# Altium PCB Main.PcbDoc (part 1 of 4)
Units mil, origin at the board's own origin, x right, y up, seen from the top; angles counter-clockwise.
Board outline 4000 x 4000 mil, 4 copper layers (L1-Top, L2-Ground, L3-Power, L4-Bottom), stack 63.556 mil thick; 424 components, 250 nets, 1628 pads, 3310 vias.
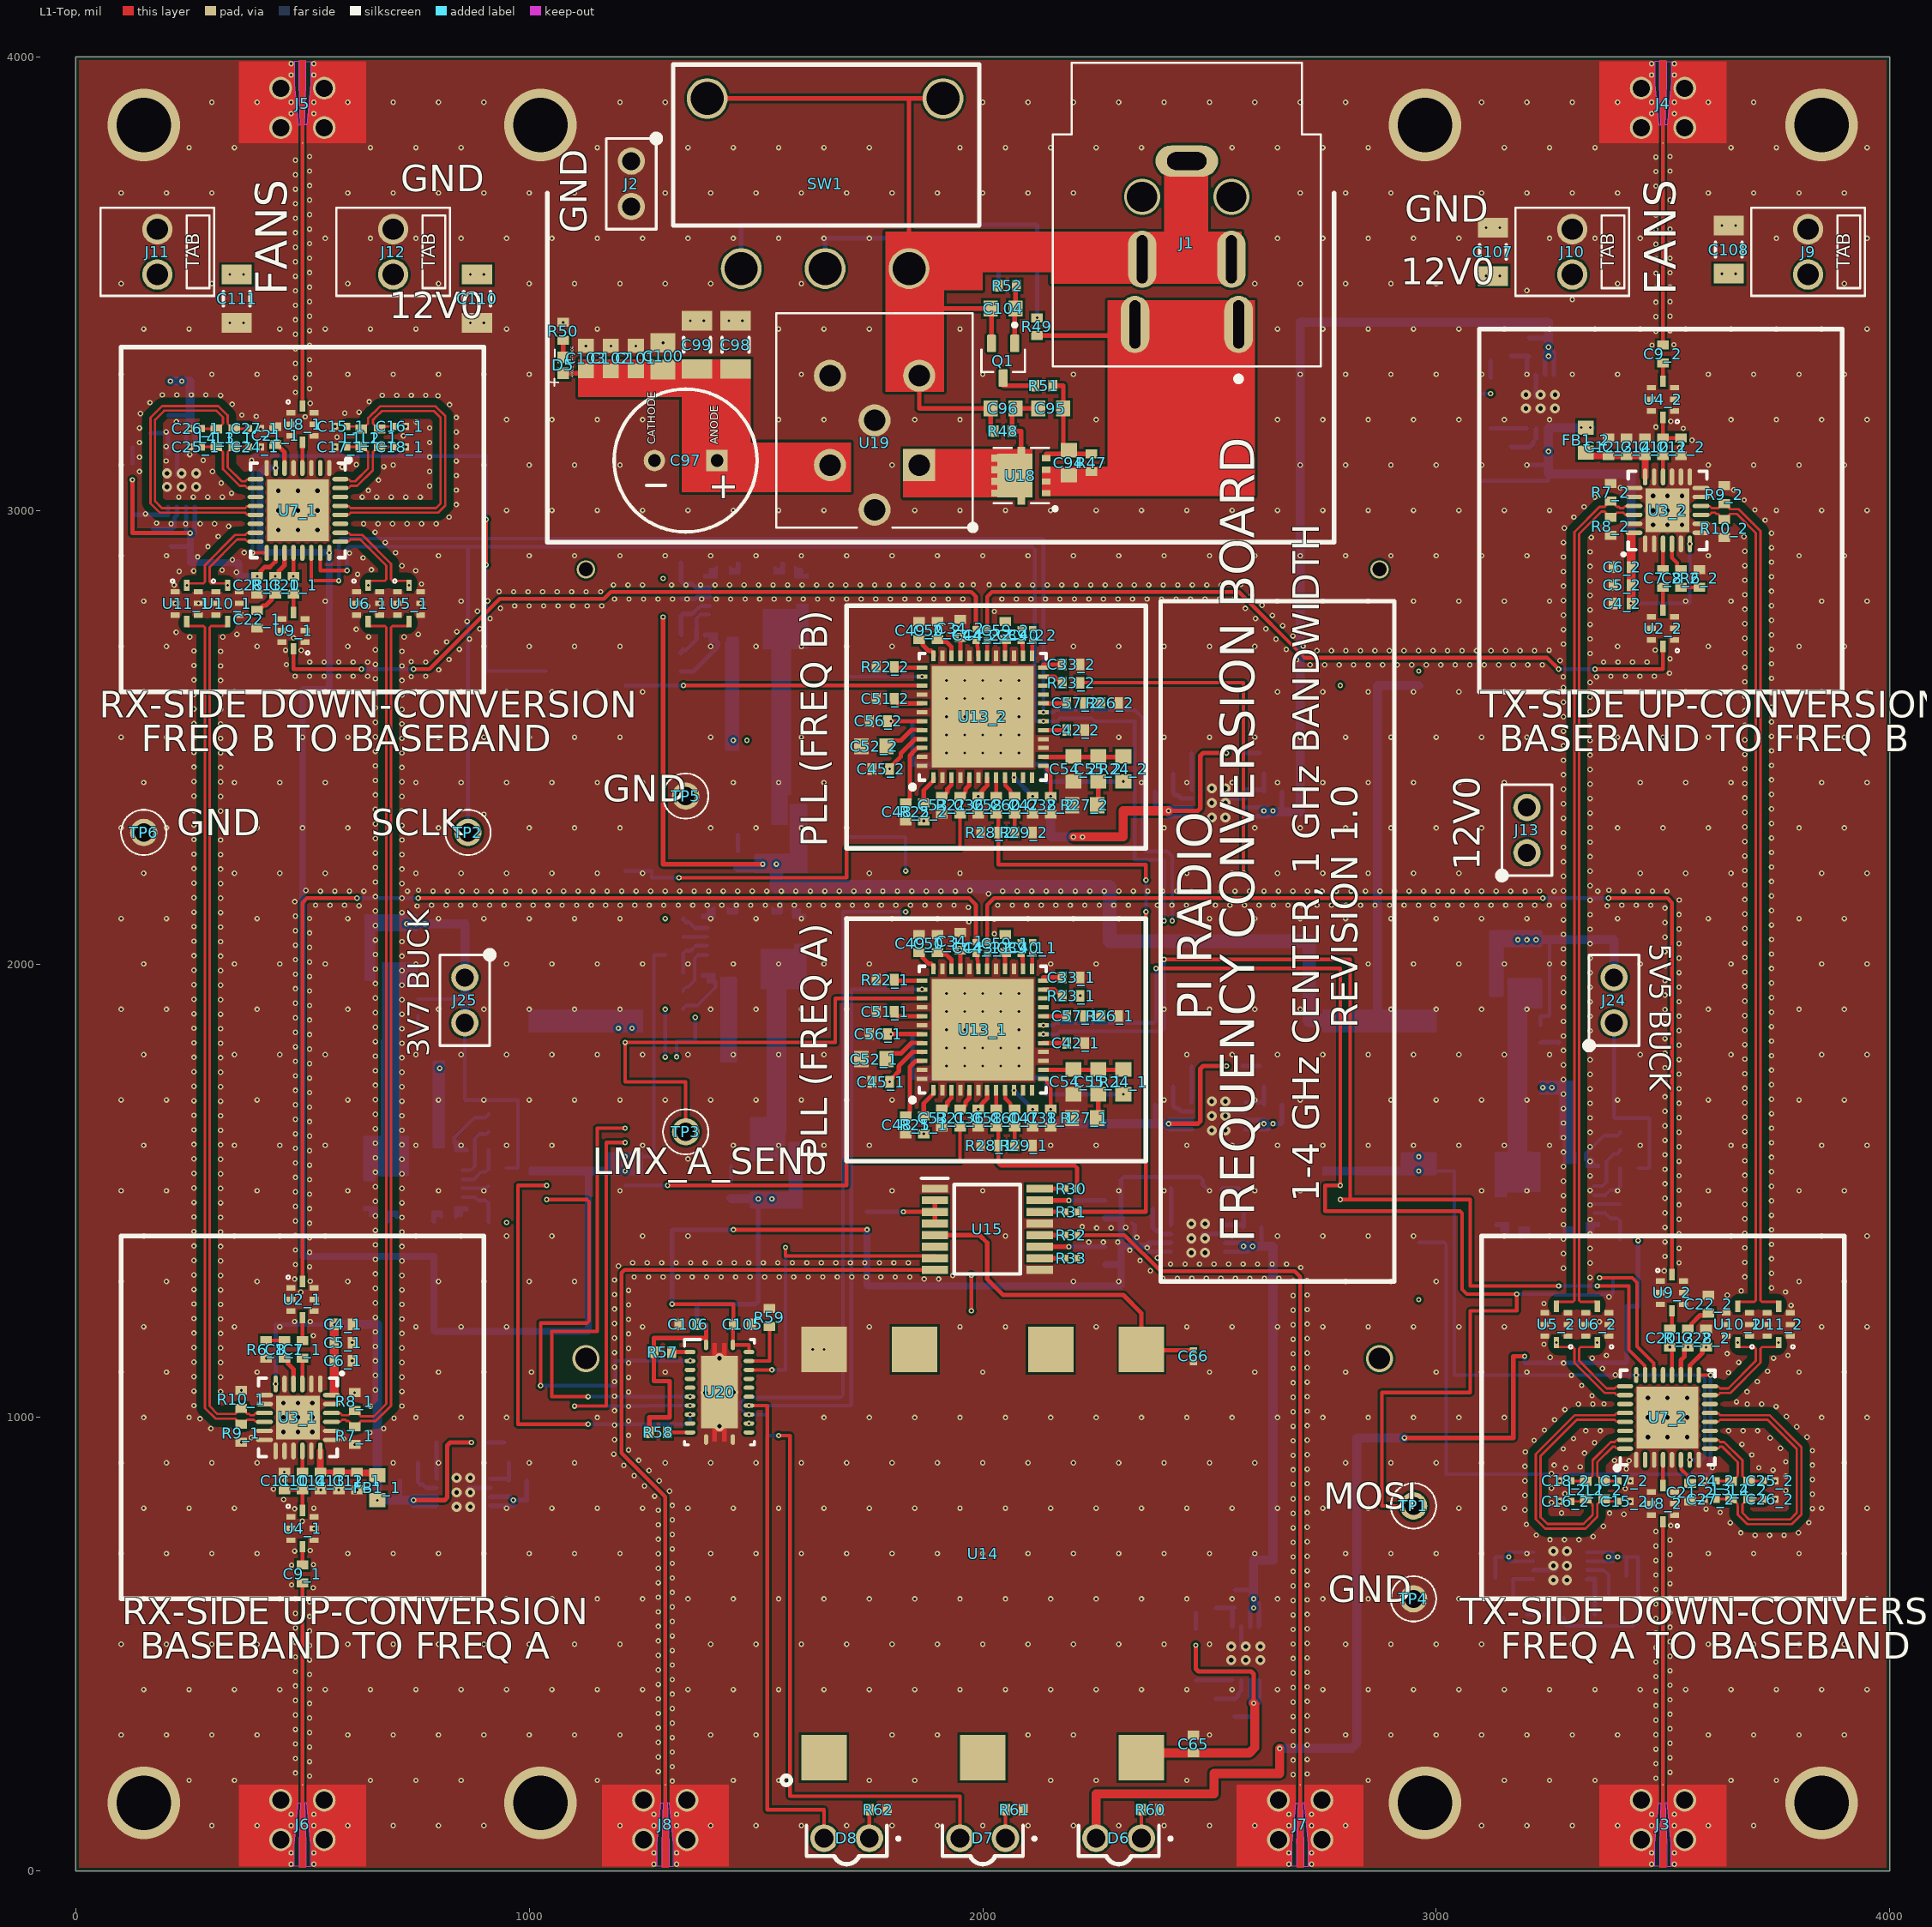
[diagram p0: L1-Top view]
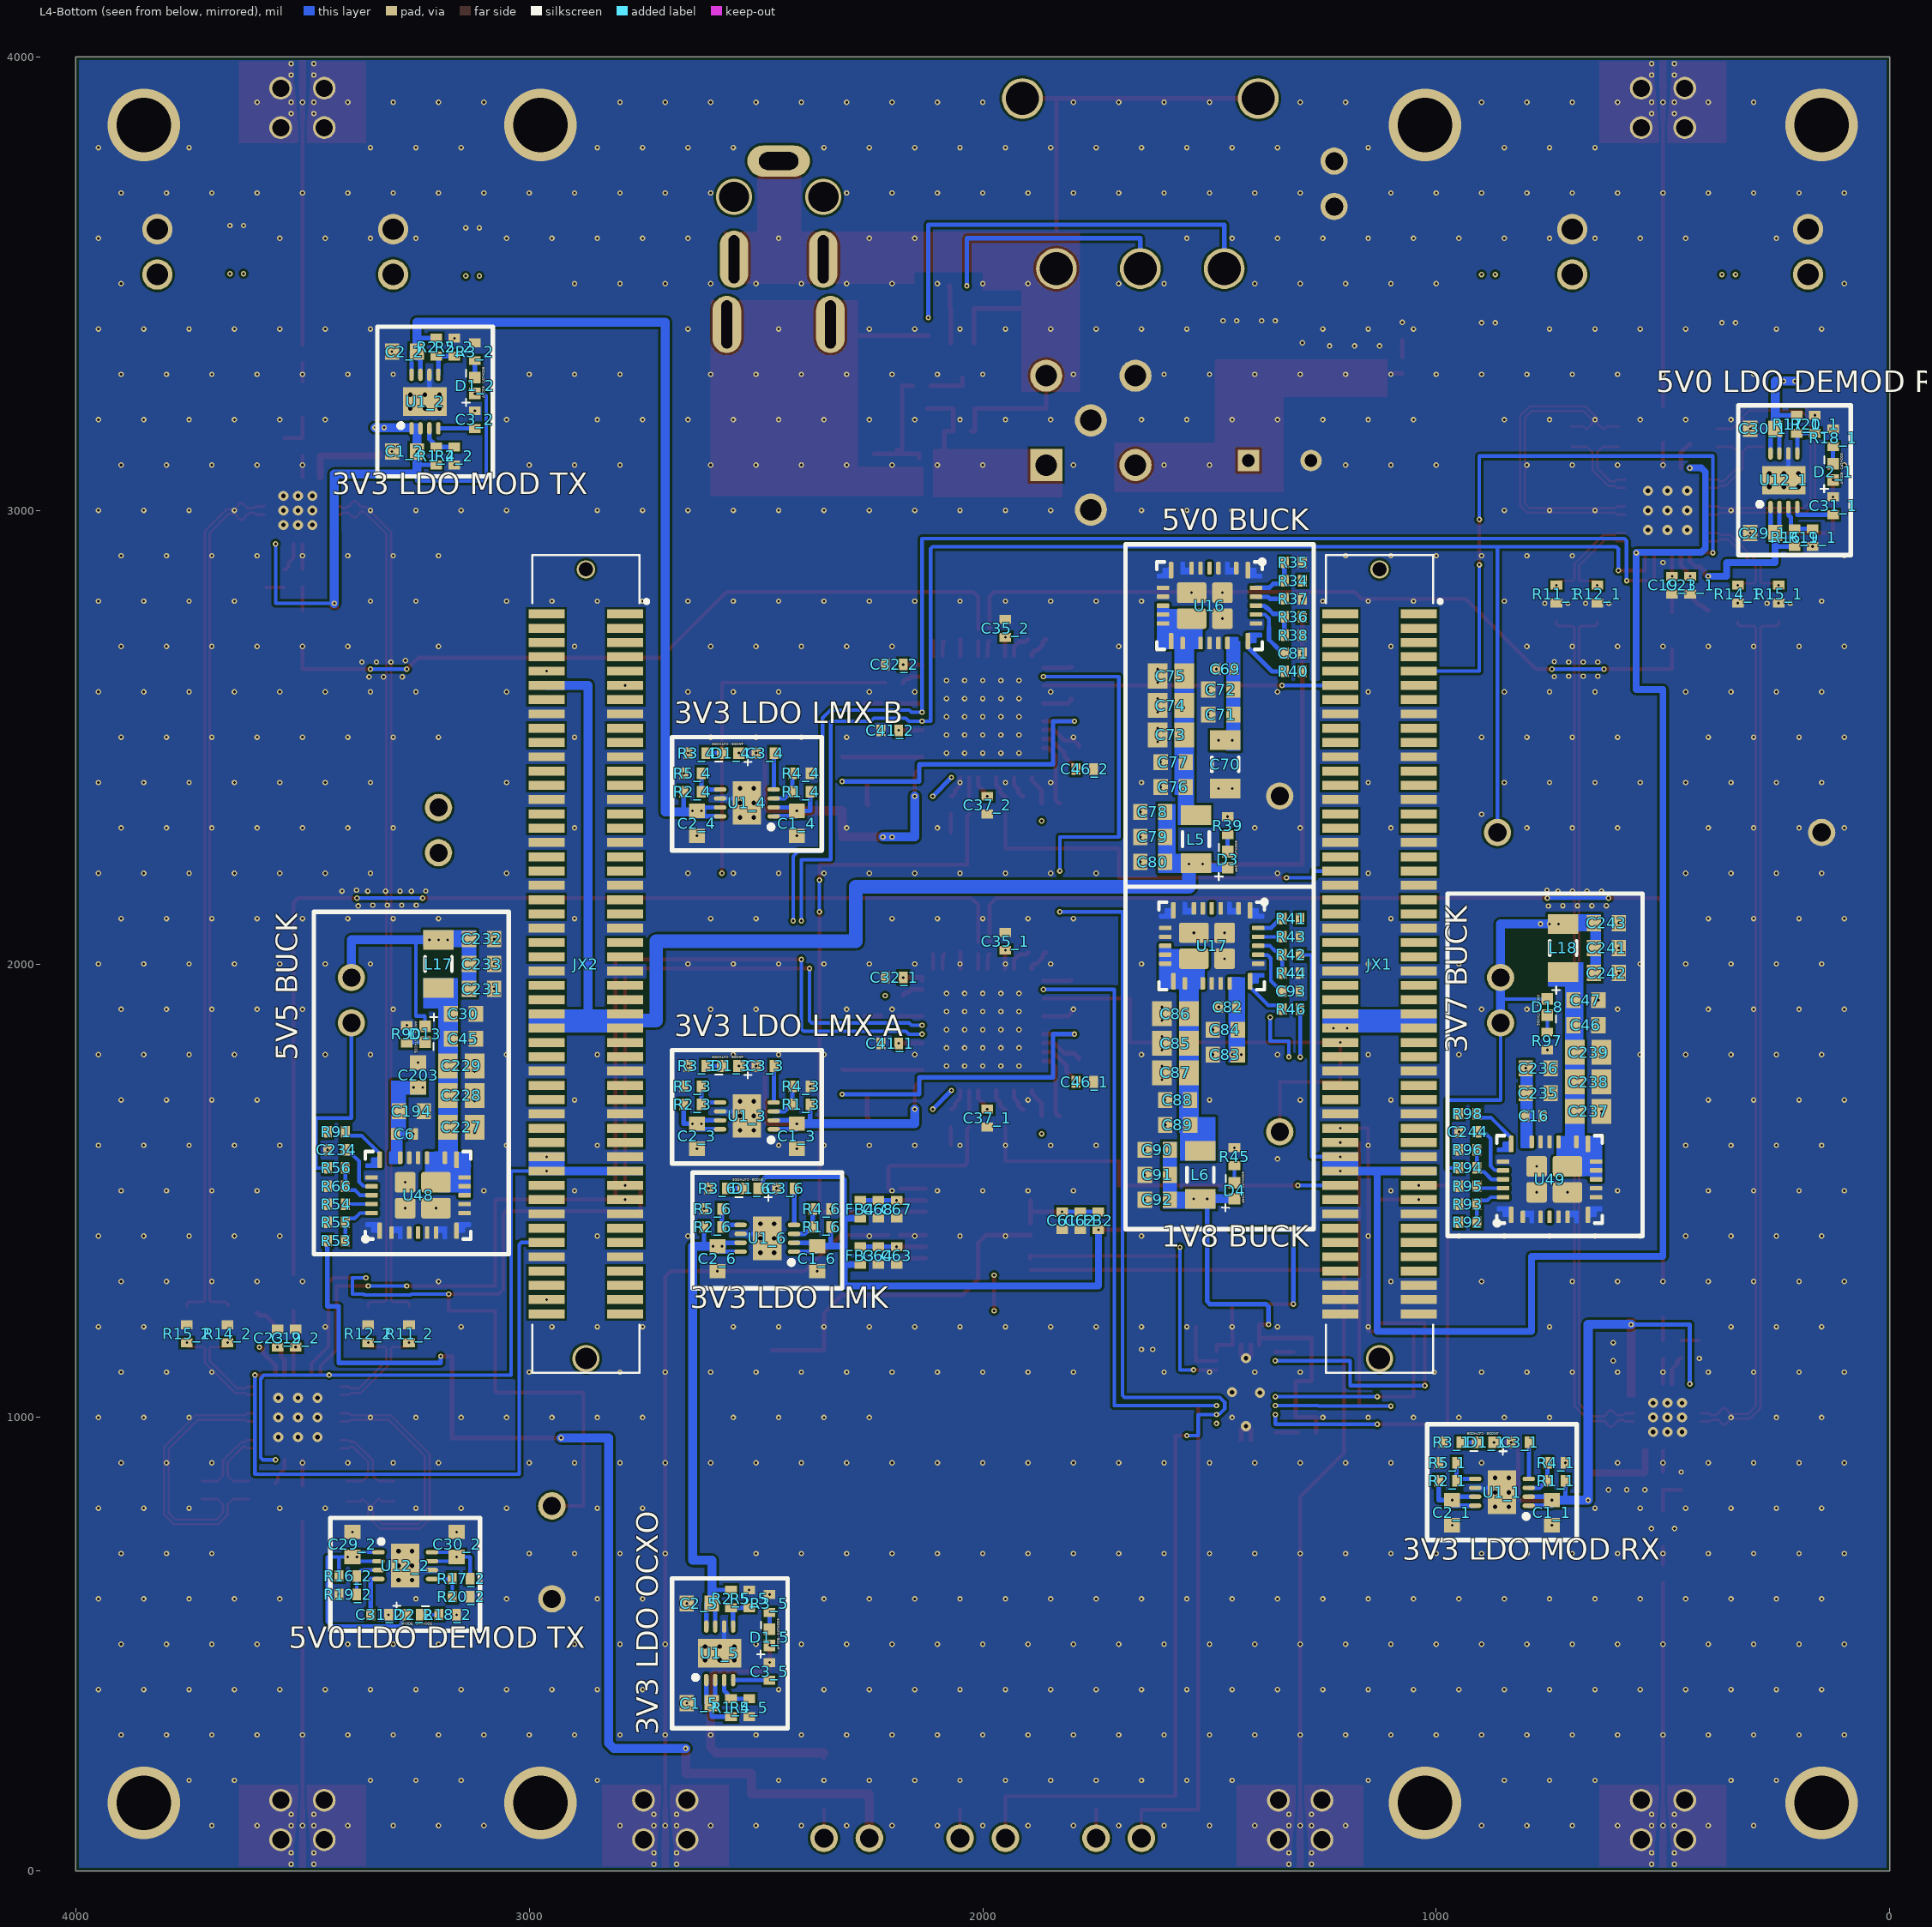
[diagram p1: L4-Bottom view, seen from below]
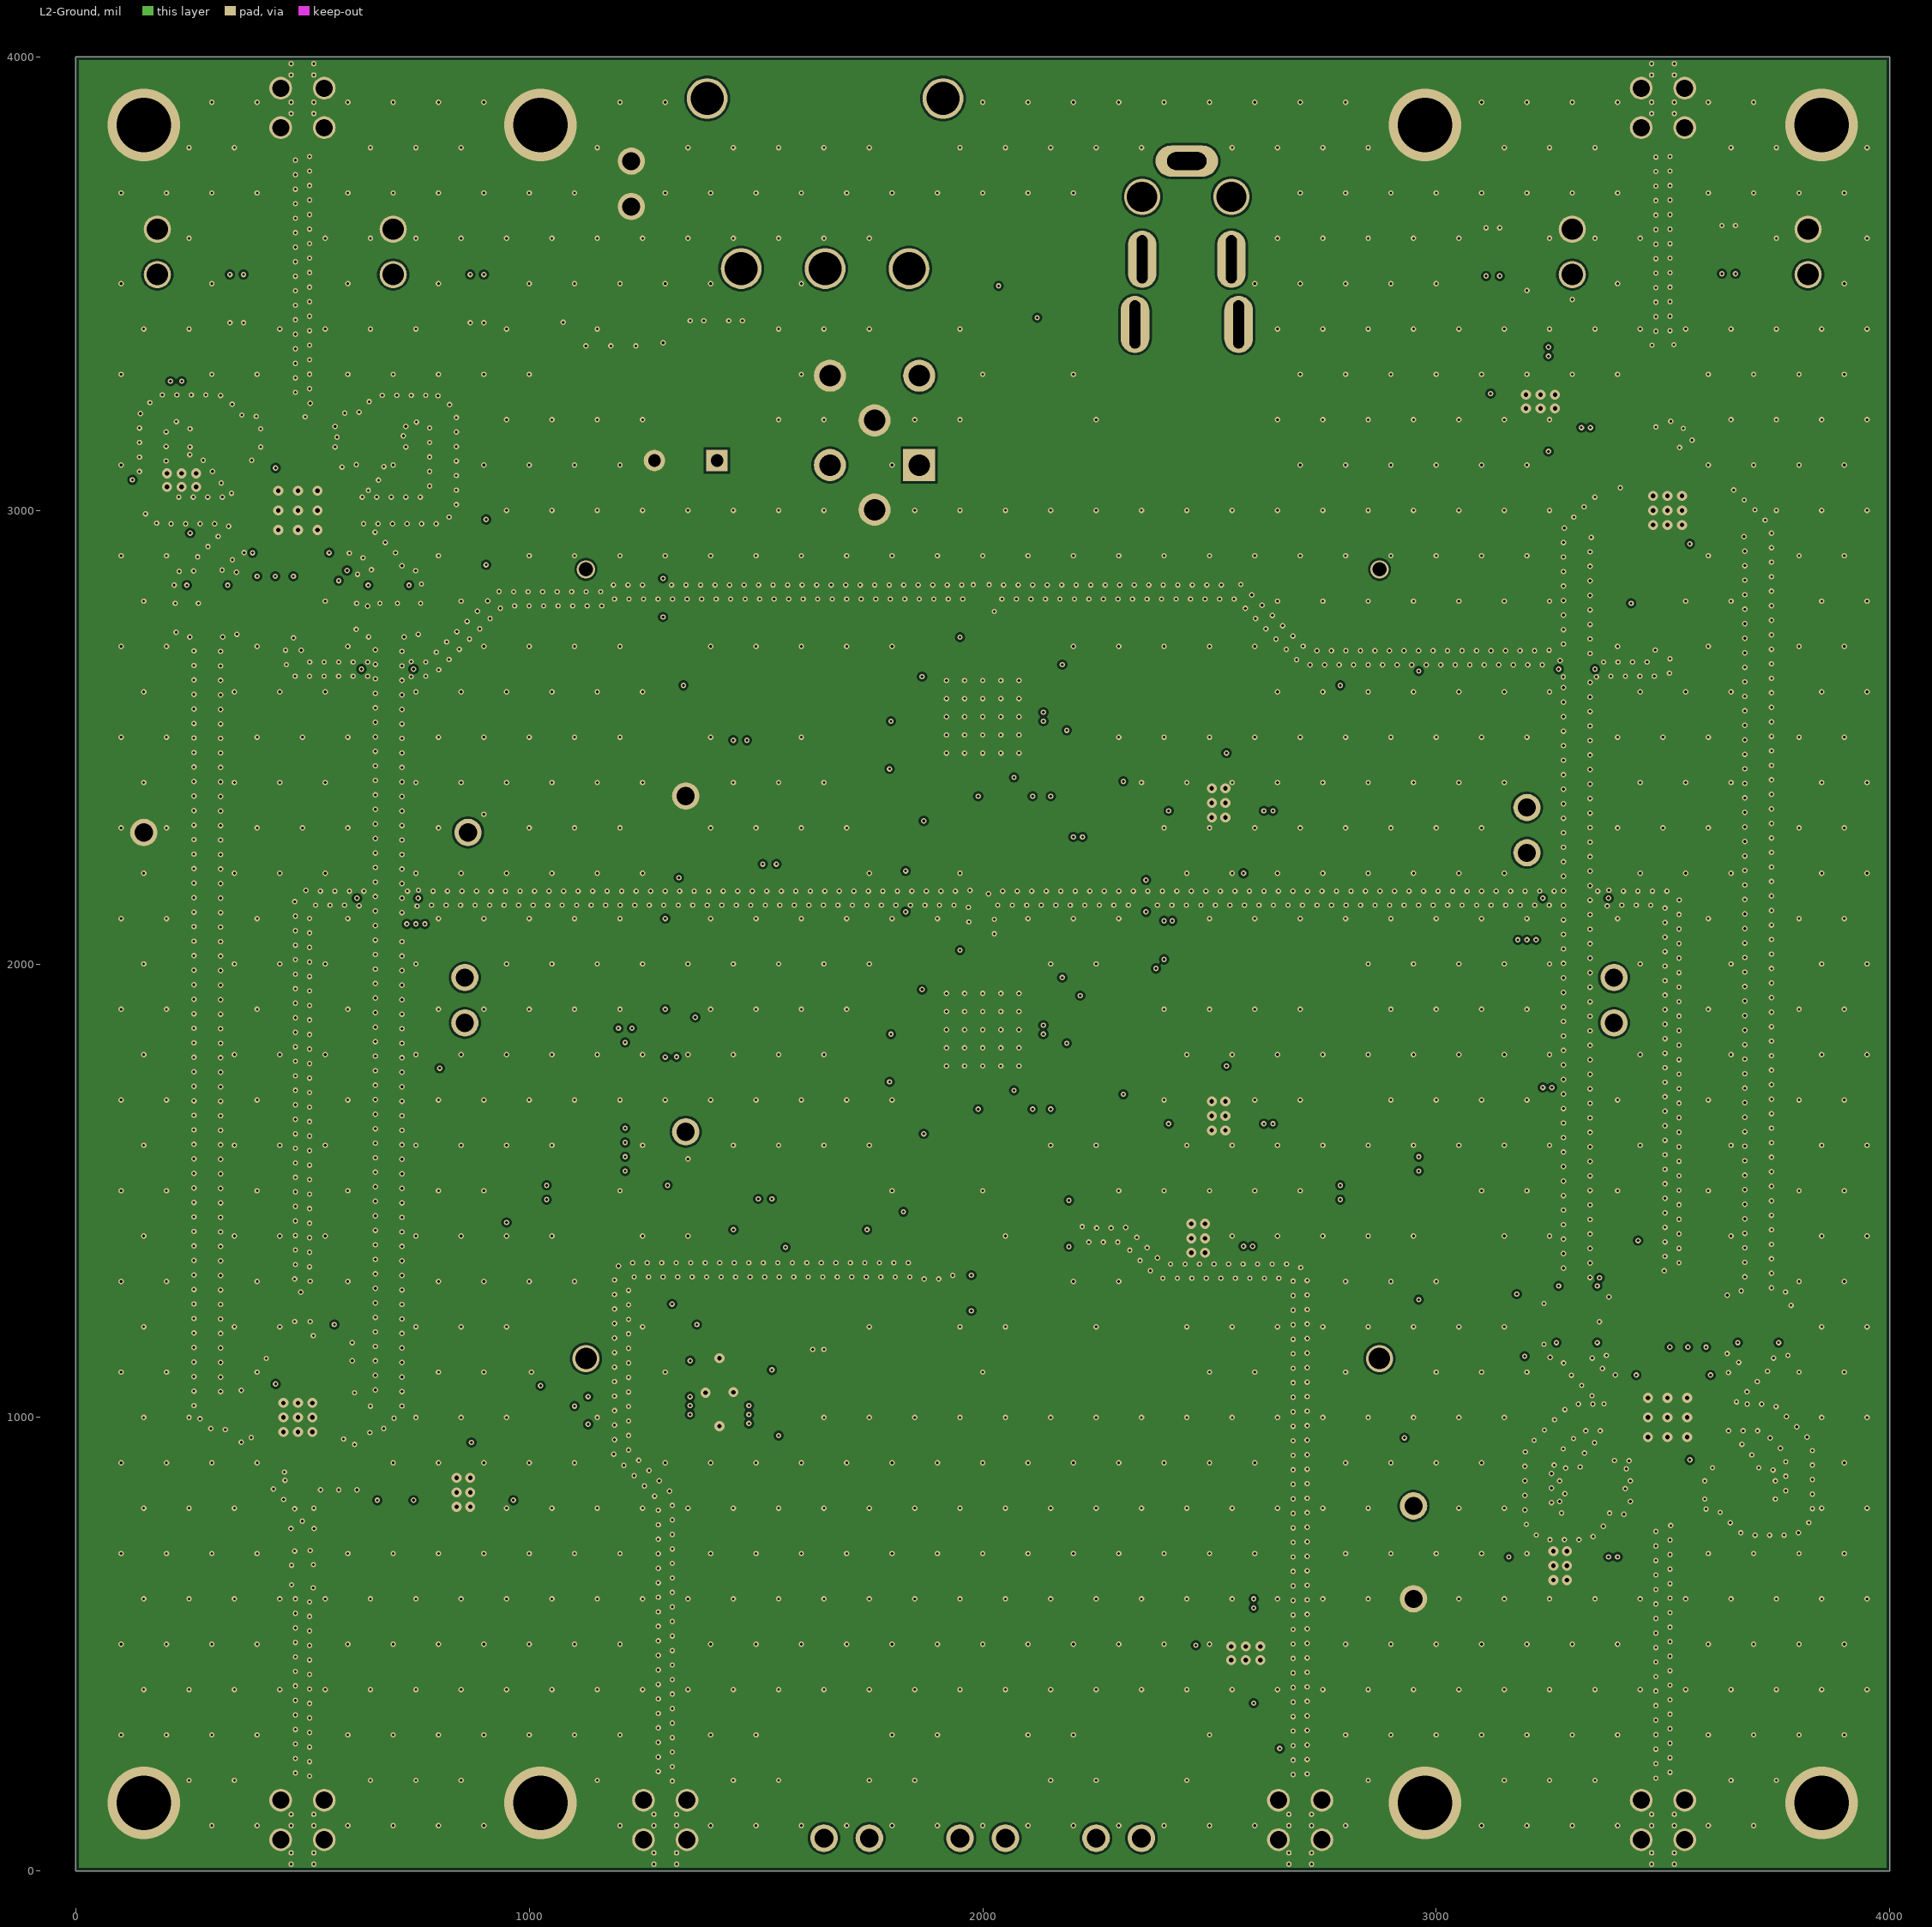
[diagram p2: L2-Ground]
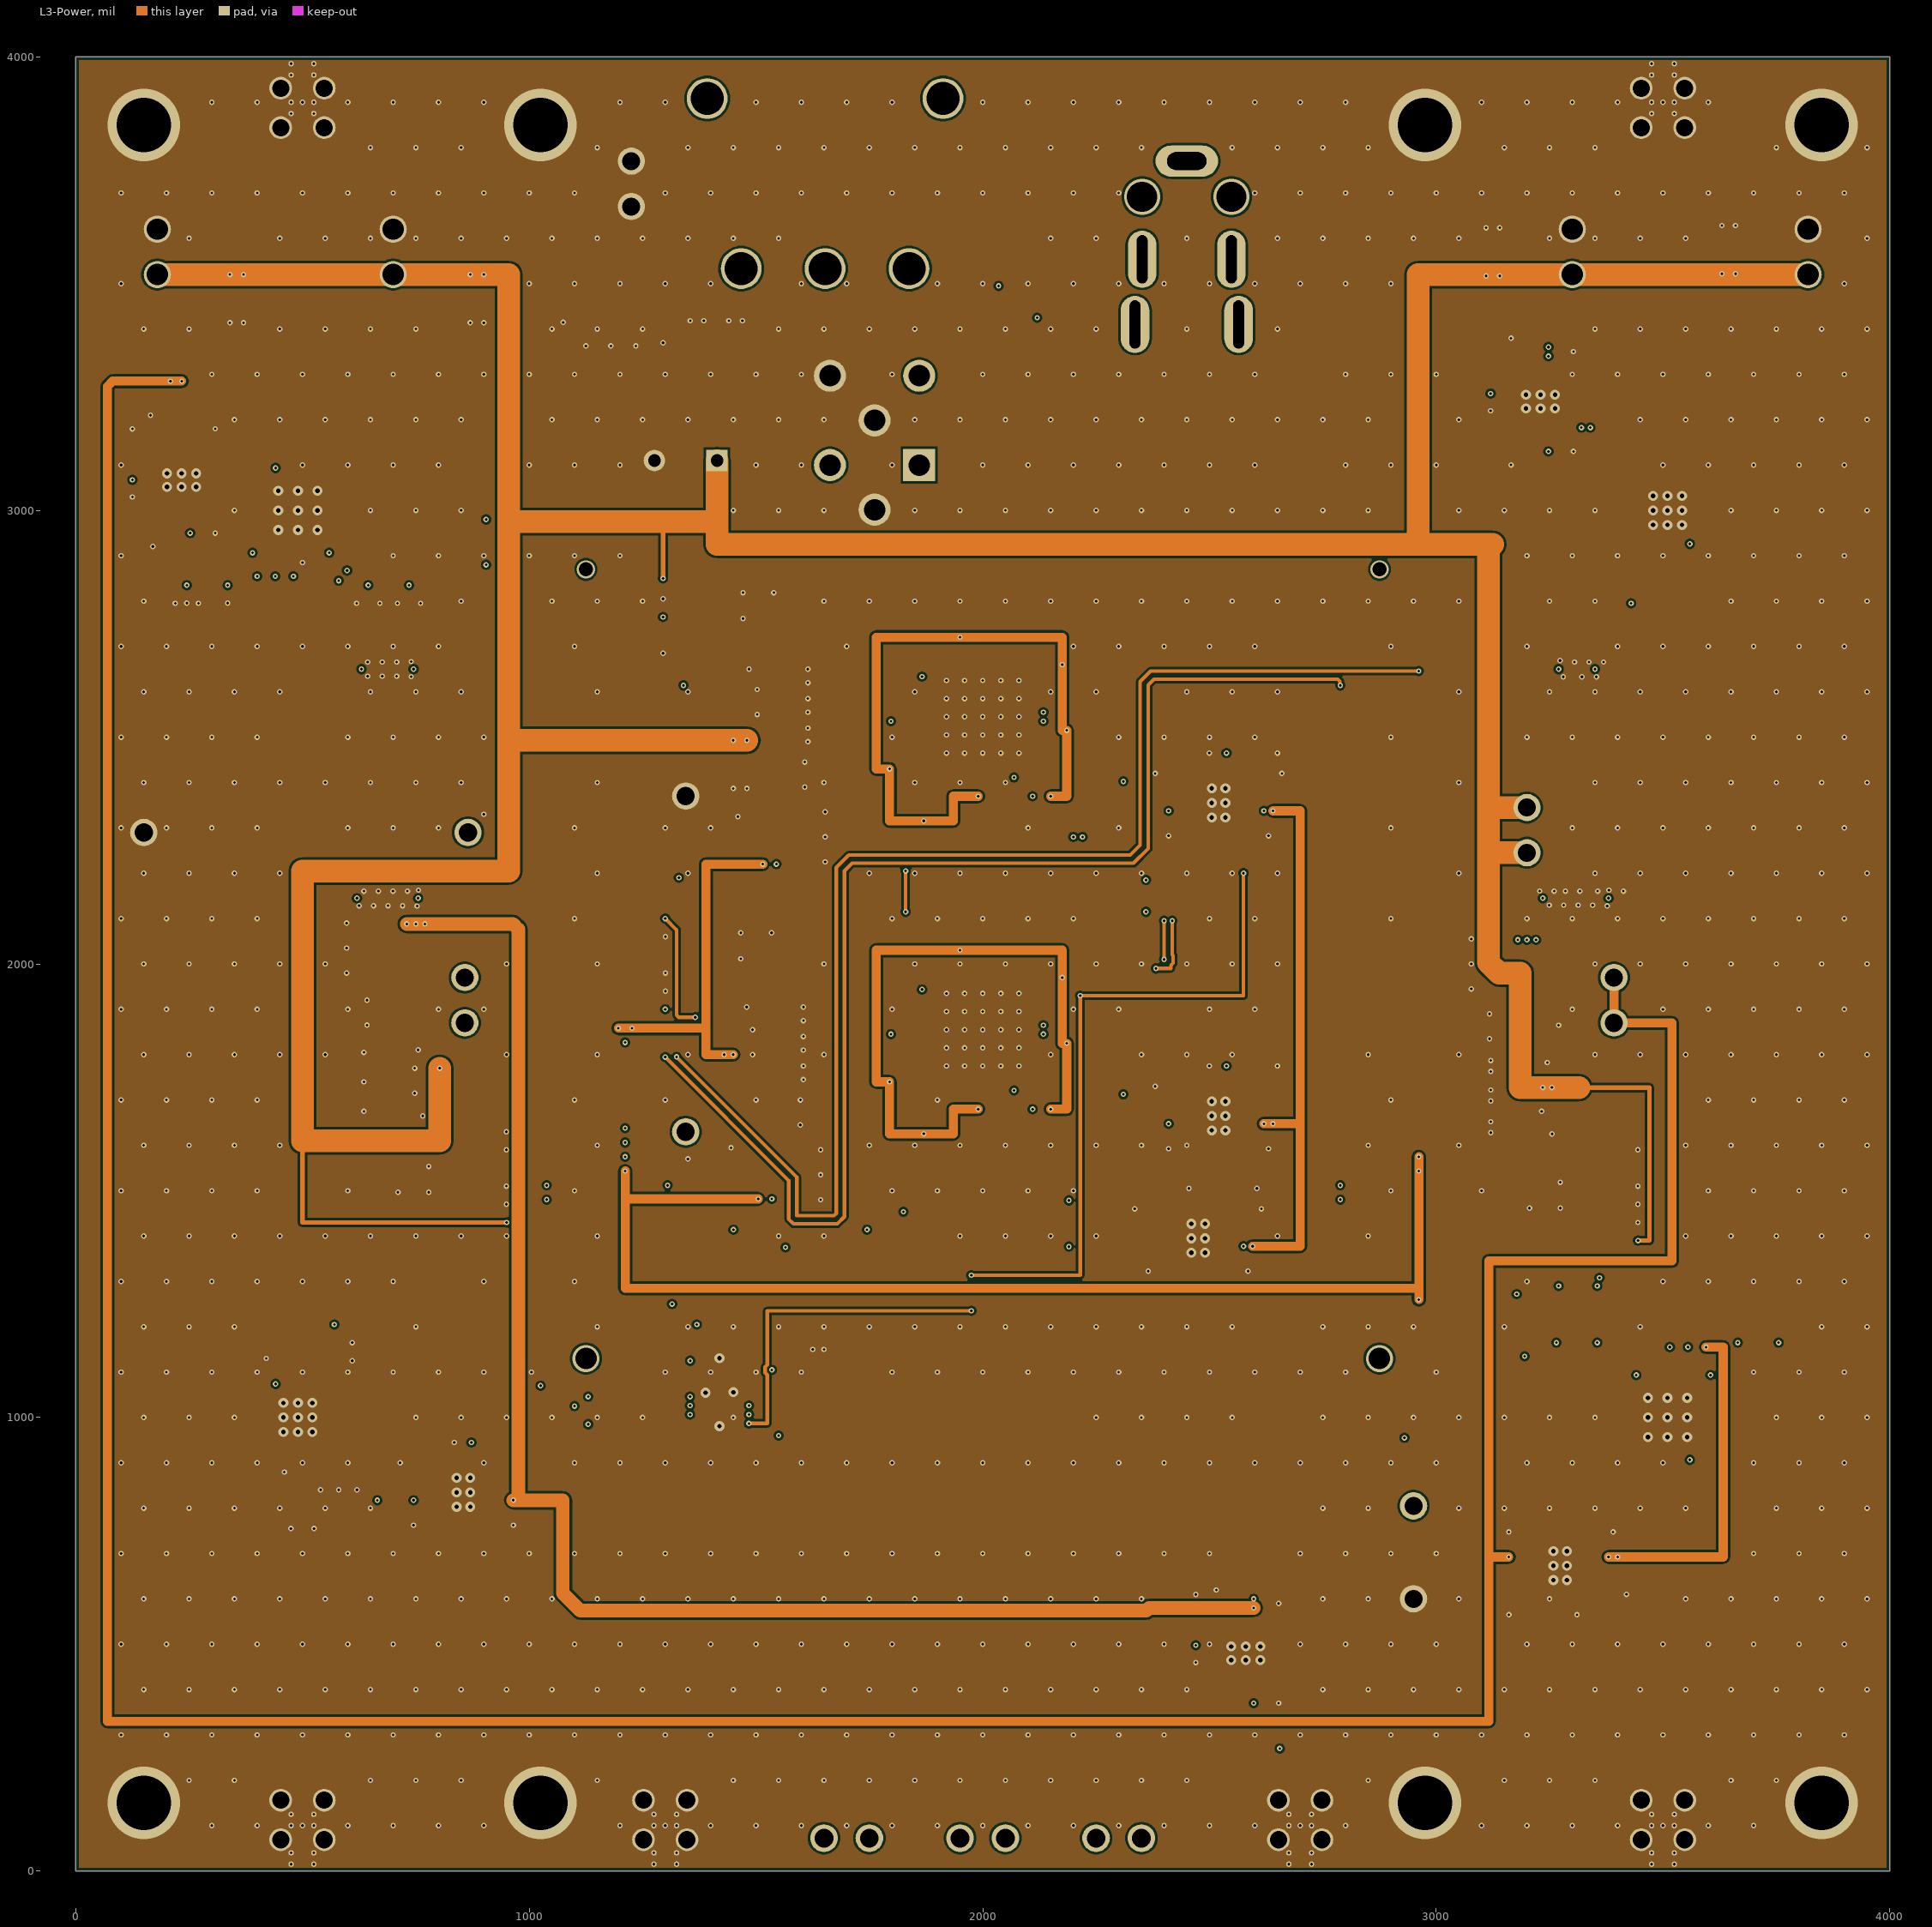
[diagram p3: L3-Power]
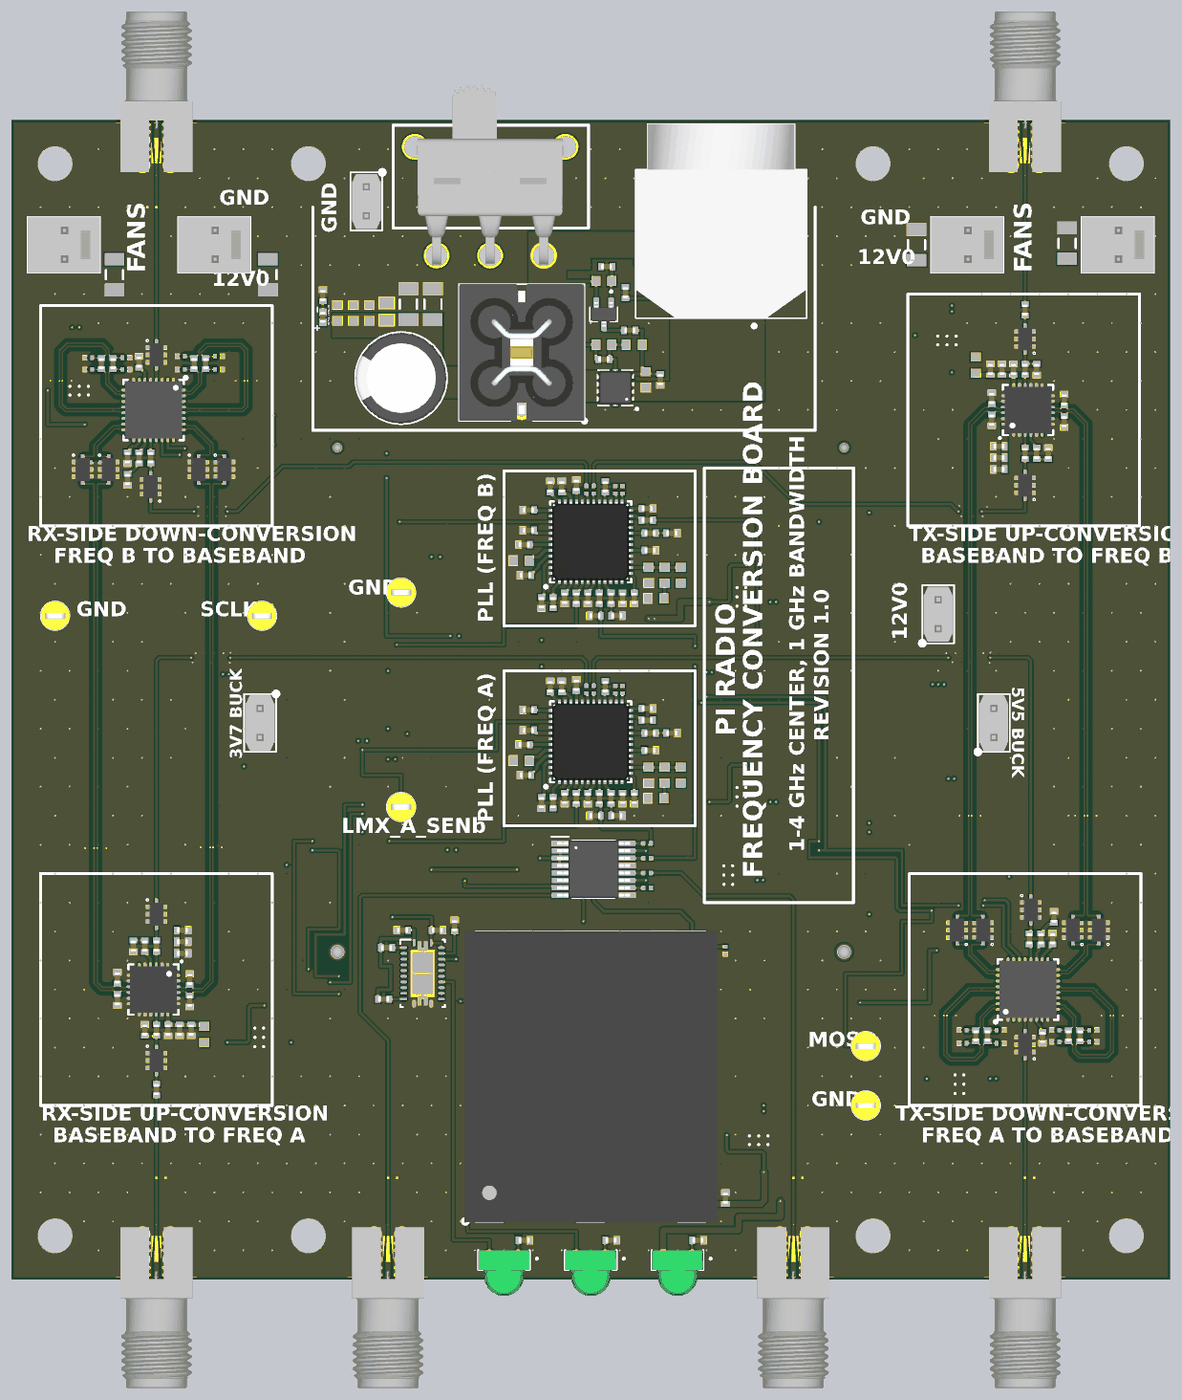
[diagram p7: 3D render of the assembled board from above, using the file's embedded part models]
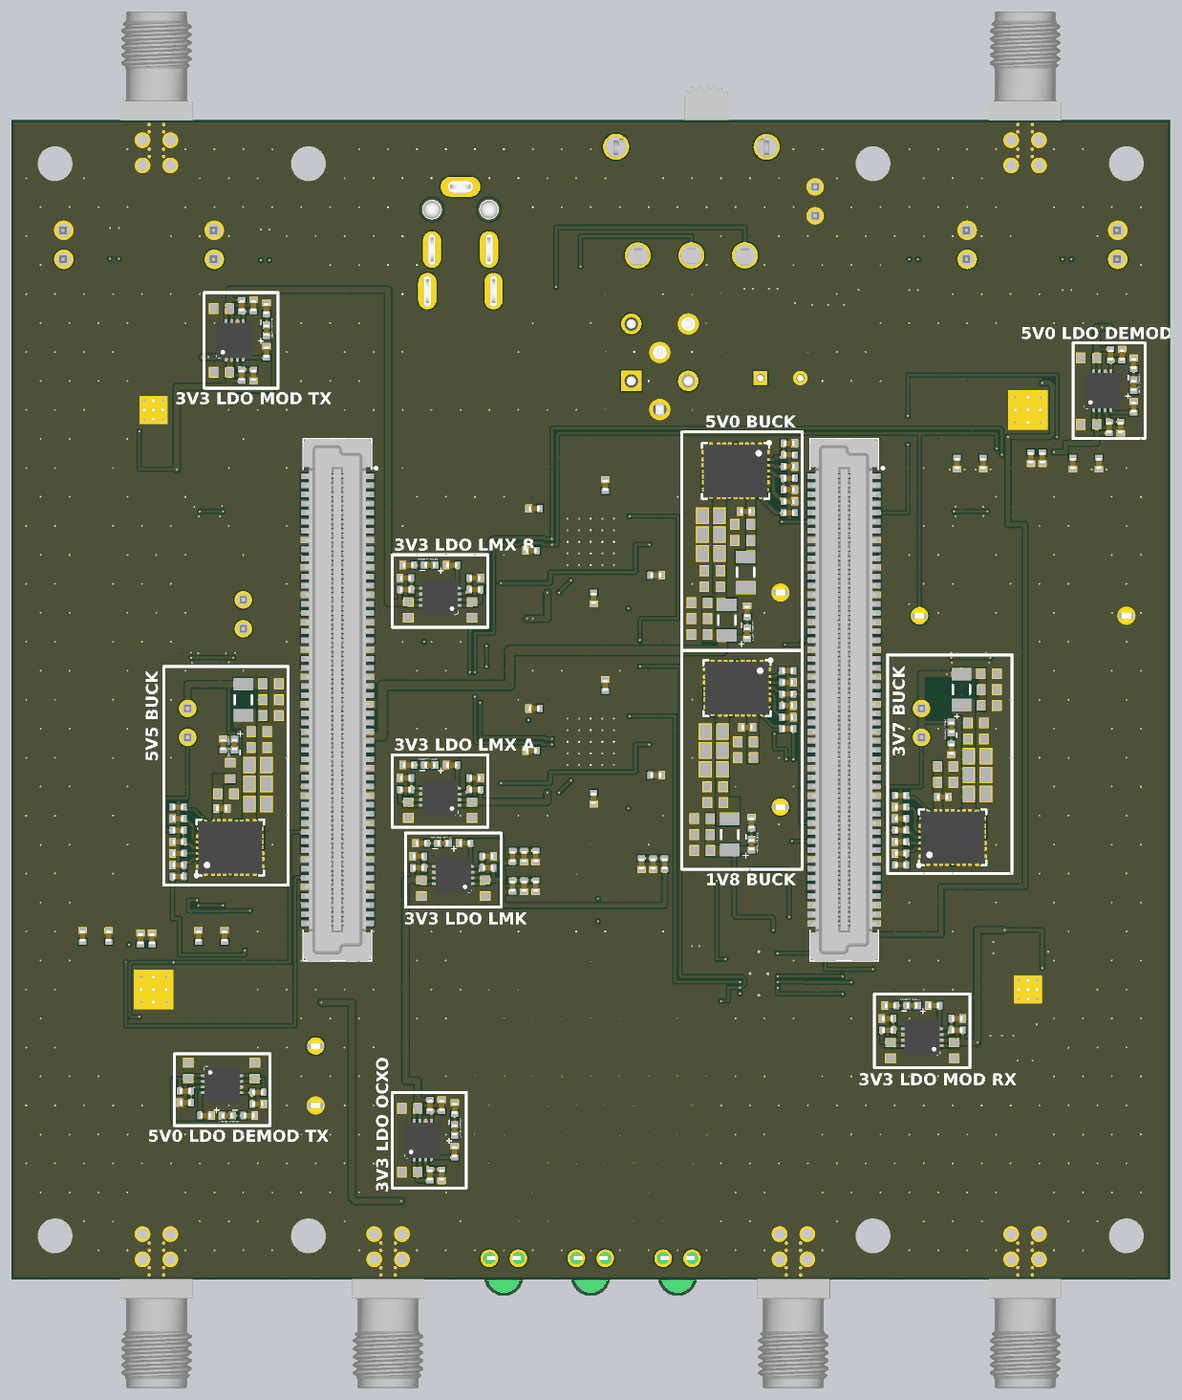
[diagram p8: 3D render of the assembled board from below, using the file's embedded part models]

## Layer stack, top to bottom
Top Solder: solder mask 0.4, Solder Resist, Dk 3.5
L1-Top: signal copper 1.378
Dielectric L1L2: core 4, FR408HR, Dk 3.55
L2-Ground: signal copper 1.4
Dielectric L4L5: prepreg 50, FR408HR, Dk 3.55
L3-Power: signal copper 1.4
Dielectric L5L6: core 4, FR408HR, Dk 3.55
L4-Bottom: signal copper 1.378
Bottom Solder: solder mask 0.4, Solder Resist, Dk 3.5

## Board outline
0,0 4000,0 4000,4000 0,4000

## Design rules (kind name [scope] priority, off if disabled: settings)
BoardOutlineClearance [All] p1: gap=7 ignorepadtopadclearanceinfootprint=FALSE
Clearance Clearance_Diff_Clearance [InNetClass('DIFF_100') vs InNet('GND')] p1: gap=5 ignorepadtopadclearanceinfootprint=FALSE except(15: Arc-Poly Track-Poly)
Clearance "Stitching GND" [IsStitchingVia and InNet('GND') vs IsStitchingVia and InNet('GND')] p2: gap=15 ignorepadtopadclearanceinfootprint=FALSE
Clearance Clearance_SMA [HasFootprint('Amphenol RF 901-10510-1 - 8.8mil GCPW') vs HasFootprint('Amphenol RF 901-10510-1 - 8.8mil GCPW')] p3: gap=0 ignorepadtopadclearanceinfootprint=FALSE
Clearance [All] p4: gap=5 ignorepadtopadclearanceinfootprint=FALSE
DiffPairsRouting [All] p1: maxlimit=10 minlimit=5 mostfreqgap=10 toplayer_maxgap=5 toplayer_prefgap=5 toplayer_minwidth=5.24 toplayer_maxwidth=5.24 toplayer_prefwidth=5.24 bottomlayer_maxgap=5 bottomlayer_prefgap=5 bottomlayer_minwidth=5.24 bottomlayer_maxwidth=5.24 bottomlayer_prefwidth=5.24 impedanceprofiledriven=TRUE impedanceprofileid={0648F5B5-C36B-4D30-86E2-53ED48371582} impedanceprofilevalue=100.000000 maxuncoupledlength=500
HoleSize [All] p1: absolutevalues=TRUE maxlimit=120 minlimit=1 maxpercent=80.000 minpercent=20.000
MinimumSolderMaskSliver [All] p1: minsoldermaskwidth=4
PolygonConnect [All] p1: connectstyle=Direct reliefconductorwidth=10 reliefentries=4 polygonreliefangle="90 Angle" airgapwidth=10
RoomDefinition U_Buck_TPSM82913_3V7 [InComponentClass('U_Buck_TPSM82913_3V7')] p1: confinementstyle=ConfineIn formatcopy=TRUE lockcomponents=FALSE outline 975,2125 975,1400 565,1400 565,2125
RoomDefinition U_Buck_TPSM82913_5V5 [InComponentClass('U_Buck_TPSM82913_5V5')] p2: confinementstyle=ConfineIn formatcopy=TRUE lockcomponents=FALSE outline 3475,2090 3475,1360 3040,1360 3040,2090
RoomDefinition IQ_Demod_RX [InComponentClass('IQ_Demod_RX')] p3: confinementstyle=ConfineIn formatcopy=TRUE lockcomponents=FALSE outline 825,3275 150,3275 150,2650 825,2650
RoomDefinition U_5V5_to_5V0_LDO1 [InComponentClass('U_5V5_to_5V0_LDO1')] p4: confinementstyle=ConfineIn formatcopy=TRUE lockcomponents=FALSE outline 100,2900 100,3235 335,3235 335,2900
RoomDefinition U_Buck_TPSM82913_1V8 [InComponentClass('U_Buck_TPSM82913_1V8')] p5: confinementstyle=ConfineIn formatcopy=TRUE lockcomponents=FALSE outline 1275,1445 1275,2160 1675,2160 1675,1445
RoomDefinition IQ_Mod_TX [InComponentClass('IQ_Mod_TX')] p6: confinementstyle=ConfineIn formatcopy=TRUE lockcomponents=FALSE outline 3675,3400 3300,3400 3300,2650 3675,2650
RoomDefinition U_Buck_TPSM82913_5V0 [InComponentClass('U_Buck_TPSM82913_5V0')] p7: confinementstyle=ConfineIn formatcopy=TRUE lockcomponents=FALSE outline 1270,2177.74 1270,2910 1680,2910 1680,2177.74
RoomDefinition U_5V5_to_5V0_LDO2 [InComponentClass('U_5V5_to_5V0_LDO2')] p8: confinementstyle=ConfineIn formatcopy=TRUE lockcomponents=FALSE outline 3440,540 3105,540 3105,775 3440,775
RoomDefinition U_3V7_to_3V3_LDO1 [InComponentClass('U_3V7_to_3V3_LDO1')] p9: confinementstyle=ConfineIn formatcopy=TRUE lockcomponents=FALSE outline 695,965 1015,965 1015,735 695,735
RoomDefinition U_3V7_to_3V3_LDO2 [InComponentClass('U_3V7_to_3V3_LDO2')] p10: confinementstyle=ConfineIn formatcopy=TRUE lockcomponents=FALSE outline 3100,3080 3100,3400 3330,3400 3330,3080
RoomDefinition U_3V7_to_3V3_LDO3 [InComponentClass('U_3V7_to_3V3_LDO3')] p11: confinementstyle=ConfineIn formatcopy=TRUE lockcomponents=FALSE outline 2360,1795 2680,1795 2680,1565 2360,1565
RoomDefinition U_3V7_to_3V3_LDO4 [InComponentClass('U_3V7_to_3V3_LDO4')] p12: confinementstyle=ConfineIn formatcopy=TRUE lockcomponents=FALSE outline 2360,2485 2680,2485 2680,2255 2360,2255
RoomDefinition U_3V7_to_3V3_LDO_Crystal [InComponentClass('U_3V7_to_3V3_LDO_Crystal')] p13: confinementstyle=ConfineIn formatcopy=TRUE lockcomponents=FALSE outline 2450,320 2450,640 2680,640 2680,320
RoomDefinition U_3V7_to_3V3_LDO_LMK [InComponentClass('U_3V7_to_3V3_LDO_LMK')] p14: confinementstyle=ConfineIn formatcopy=TRUE lockcomponents=FALSE outline 2315,1525 2635,1525 2635,1295 2315,1295
RoomDefinition LMX2820_B [InComponentClass('LMX2820_B')] p15: confinementstyle=ConfineIn formatcopy=TRUE lockcomponents=FALSE outline 1700,2255 2360,2255 2360,2790 1700,2790
RoomDefinition LMX2820_A [InComponentClass('LMX2820_A')] p16: confinementstyle=ConfineIn formatcopy=TRUE lockcomponents=FALSE outline 1700,1565 2360,1565 2360,2100 1700,2100
RoomDefinition IQ_Mod_RX [InComponentClass('IQ_Mod_RX')] p17: confinementstyle=ConfineIn formatcopy=TRUE lockcomponents=FALSE outline 325,600 695,600 695,1350 325,1350
RoomDefinition IQ_Demod_TX [InComponentClass('IQ_Demod_TX')] p18: confinementstyle=ConfineIn formatcopy=TRUE lockcomponents=FALSE outline 3175,725 3850,725 3850,1350 3175,1350
RoutingVias [All] p1: holewidth=28 width=50 viastyle="Through Hole" minholewidth=28 minwidth=50 maxholewidth=28 maxwidth=50
SilkToSilkClearance [All] p1: silktosilkclearance=5
SilkToSolderMaskClearance [IsPad] p1: minsilkscreentomaskgap=2 clearancetoexposedcopper=TRUE
SolderMaskExpansion [All] p1: expansion=1 istentingtop=FALSE
SupplyNets "Schematic Supply Nets_6" [InNet('3V3')] p1: voltage=0.000
SupplyNets "Schematic Supply Nets_5" [InNet('5V5_Buck')] p2: voltage=0.000
SupplyNets "Schematic Supply Nets_7" [InNet('1V8')] p3: voltage=0.000
SupplyNets "Schematic Supply Nets_1" [InNet('12V0')] p4: voltage=0.000
SupplyNets "Schematic Supply Nets_17" [InNet('3V3_LDO_LMX_1')] p5: voltage=0.000
SupplyNets "Schematic Supply Nets_16" [InNet('VCCA_IQ_MOD_2')] p6: voltage=0.000
SupplyNets "Schematic Supply Nets_15" [InNet('VCCA_IQ_MOD_1')] p7: voltage=0.000
SupplyNets "Schematic Supply Nets_14" [InNet('VCCD_IQ_MOD_1')] p8: voltage=0.000
SupplyNets "Schematic Supply Nets_13" [InNet('3V3_LDO_LMX_2')] p9: voltage=0.000
SupplyNets "Schematic Supply Nets_12" [InNet('VCCD_IQ_MOD_2')] p10: voltage=0.000
SupplyNets "Schematic Supply Nets_11" [InNet('GND_IN')] p11: voltage=0.000
SupplyNets "Schematic Supply Nets_8" [InNet('5V0_Zynq')] p12: voltage=0.000
SupplyNets "Schematic Supply Nets_4" [InNet('3V7_Buck')] p13: voltage=0.000
SupplyNets "Schematic Supply Nets_3" [InNet('GND')] p14: voltage=0.000
SupplyNets "Schematic Supply Nets" [InNet('3V3_LDO_Crystal')] p15: voltage=0.000
Width Width_GCPW [InNetClass('RF50')] p1: maxlimit=8.8 minlimit=8 preferedwidth=8.8 toplayer_minwidth=8.8 midlayer2_minwidth=8.8 midlayer3_minwidth=8.8 minimp=50.000000 maximp=50.000000 favimp=50.000000
Width [All] p2: maxlimit=50 minlimit=8 preferedwidth=10 toplayer_maxwidth=20 midlayer2_maxwidth=20 bottomlayer_maxwidth=30 minimp=50.000000 maximp=50.000000 favimp=50.000000
25 further rules are at their usual default settings.

## Classes and differential pairs
net class DIFF_100: AI_1_N AI_1_P AI_2_N AI_2_P AQ_1_N AQ_1_P AQ_2_N AQ_2_P MI_1_N MI_1_P MI_2_N MI_2_P MQ_1_N MQ_1_P MQ_2_N MQ_2_P OP_I_1_N OP_I_1_P OP_I_2_N OP_I_2_P OP_IF_1_N OP_IF_1_P OP_IF_2_N OP_IF_2_P OP_Q_1_N OP_Q_1_P OP_Q_2_N OP_Q_2_P OP_QF_1_N OP_QF_1_P OP_QF_2_N OP_QF_2_P
component class U_Fan_Interfaces: C107 C108 C110 C111 J9 J10 J11 J12
component class U_Voltage_Conv_Bidirectional: C105 C106 R57 R58 R59 U20
component class U_Buck_TPSM82913_5V5: C6 C30 C45 C194 C203 C227 C228 C229 C231 C232 C233 C234 D13 J24 L17 R53 R54 R55 R56 R66 R90 R91 U48
component class U_Buck_TPSM82913_3V7: C16 C46 C47 C235 C236 C237 C238 C239 C241 C242 C243 C244 D18 J25 L18 R92 R93 R94 R95 R96 R97 R98 U49
component class Main: D6 D7 D8 J3 J4 J5 J6 J7 J8 R60 R61 R62 TP1 TP2 TP3 TP4 TP5 TP6
component class U_Power_Supply: C94 C95 C96 C97 C98 C99 C100 C101 C102 C103 C104 D5 J1 J2 J13 Q1 R47 R48 R49 R50 R51 R52 SW1 U18 U19
component class U_Microzed_Interfaces: JX1 JX2
component class U_Buck_TPSM82913_5V0: C69 C70 C71 C72 C73 C74 C75 C76 C77 C78 C79 C80 C81 D3 L5 R34 R35 R36 R37 R38 R39 R40 U16
component class U_Buck_TPSM82913_1V8: C82 C83 C84 C85 C86 C87 C88 C89 C90 C91 C92 C93 D4 L6 R41 R42 R43 R44 R45 R46 U17
differential pair class DEMOD_OUT: OP_I_1 OP_I_2 OP_IF_1 OP_IF_2 OP_Q_1 OP_Q_2 OP_QF_1 OP_QF_2
channel class IQ_Mod: IQ_Mod_RX IQ_Mod_TX
channel class IQ_Demod: IQ_Demod_RX IQ_Demod_TX
channel class 5V5_to_5V0_LDO: U_5V5_to_5V0_LDO1 U_5V5_to_5V0_LDO2
component class U_Clocking_and_LO: C61 C62 C63 C64 C65 C66 C67 C68 FB2 FB3 FB4 R30 R31 R32 R33 U14 U15
component class U_5V5_to_5V0_LDO2: C29_2 C30_2 C31_2 D2_2 R16_2 R17_2 R18_2 R19_2 R20_2 U12_2
component class U_5V5_to_5V0_LDO1: C29_1 C30_1 C31_1 D2_1 R16_1 R17_1 R18_1 R19_1 R20_1 U12_1
component class U_3V7_to_3V3_LDO4: C1_4 C2_4 C3_4 D1_4 R1_4 R2_4 R3_4 R4_4 R5_4 U1_4
component class U_3V7_to_3V3_LDO3: C1_3 C2_3 C3_3 D1_3 R1_3 R2_3 R3_3 R4_3 R5_3 U1_3
component class IQ_Mod_TX: C4_2 C5_2 C6_2 C7_2 C8_2 C9_2 C10_2 C11_2 C12_2 C13_2 C14_2 FB1_2 R6_2 R7_2 R8_2 R9_2 R10_2 U2_2 U3_2 U4_2
component class IQ_Mod_RX: C4_1 C5_1 C6_1 C7_1 C8_1 C9_1 C10_1 C11_1 C12_1 C13_1 C14_1 FB1_1 R6_1 R7_1 R8_1 R9_1 R10_1 U2_1 U3_1 U4_1
component class IQ_Demod_TX: C15_2 C16_2 C17_2 C18_2 C19_2 C20_2 C21_2 C22_2 C23_2 C24_2 C25_2 C26_2 C27_2 C28_2 L1_2 L2_2 L3_2 L4_2 R11_2 R12_2 R13_2 R14_2 R15_2 U5_2 U6_2 U7_2 U8_2 U9_2 U10_2 U11_2
component class IQ_Demod_RX: C15_1 C16_1 C17_1 C18_1 C19_1 C20_1 C21_1 C22_1 C23_1 C24_1 C25_1 C26_1 C27_1 C28_1 L1_1 L2_1 L3_1 L4_1 R11_1 R12_1 R13_1 R14_1 R15_1 U5_1 U6_1 U7_1 U8_1 U9_1 U10_1 U11_1
channel class LMX2820: LMX2820_A LMX2820_B
channel class 3V7_to_3V3_LDO: U_3V7_to_3V3_LDO1 U_3V7_to_3V3_LDO2 U_3V7_to_3V3_LDO3 U_3V7_to_3V3_LDO4 U_3V7_to_3V3_LDO_Crystal U_3V7_to_3V3_LDO_LMK
net class RF50: IF_1 IF_2 IFIN_1 IFIN_2 LO_1_P LO_2_P LO_A_N LO_A_P LO_B_N LO_B_P LOM_1 LOM_2 NetC7_1_2 NetC7_2_2 NetC9_1_1 NetC9_1_2 NetC9_2_1 NetC9_2_2 NetC10_1_1 NetC10_2_1 NetC20_1_1 NetC20_2_1 NetC39_1_1 NetC39_1_2 NetC39_2_1 NetC39_2_2 NetC40_1_1 NetC40_1_2 NetC40_2_1 NetC40_2_2 NetC43_1_1 NetC43_2_1 NetC44_1_1 NetC44_2_1 NetC58_1_1 NetC58_1_2 NetC58_2_1 NetC58_2_2 NetC60_1_1 NetC60_2_1 NetJ3_S NetJ5_S NetJ7_S NetJ8_S
component class U_3V7_to_3V3_LDO_LMK: C1_6 C2_6 C3_6 D1_6 R1_6 R2_6 R3_6 R4_6 R5_6 U1_6
component class U_3V7_to_3V3_LDO_Crystal: C1_5 C2_5 C3_5 D1_5 R1_5 R2_5 R3_5 R4_5 R5_5 U1_5
component class U_3V7_to_3V3_LDO2: C1_2 C2_2 C3_2 D1_2 R1_2 R2_2 R3_2 R4_2 R5_2 U1_2
component class U_3V7_to_3V3_LDO1: C1_1 C2_1 C3_1 D1_1 R1_1 R2_1 R3_1 R4_1 R5_1 U1_1
component class LMX2820_B: C32_2 C33_2 C34_2 C35_2 C36_2 C37_2 C38_2 C39_2 C40_2 C41_2 C42_2 C43_2 C44_2 C45_2 C46_2 C47_2 C48_2 C49_2 C50_2 C51_2 C52_2 C53_2 C54_2 C55_2 C56_2 C57_2 C58_2 C59_2 C60_2 R21_2 R22_2 R23_2 R24_2 R25_2 R26_2 R27_2 R28_2 R29_2 U13_2
component class LMX2820_A: C32_1 C33_1 C34_1 C35_1 C36_1 C37_1 C38_1 C39_1 C40_1 C41_1 C42_1 C43_1 C44_1 C45_1 C46_1 C47_1 C48_1 C49_1 C50_1 C51_1 C52_1 C53_1 C54_1 C55_1 C56_1 C57_1 C58_1 C59_1 C60_1 R21_1 R22_1 R23_1 R24_1 R25_1 R26_1 R27_1 R28_1 R29_1 U13_1
differential pair OP_QF_2: +OP_QF_2_P -OP_QF_2_N
differential pair OP_QF_1: +OP_QF_1_P -OP_QF_1_N
differential pair OP_Q_2: +OP_Q_2_P -OP_Q_2_N
differential pair OP_Q_1: +OP_Q_1_P -OP_Q_1_N
differential pair OP_IF_2: +OP_IF_2_P -OP_IF_2_N
differential pair OP_IF_1: +OP_IF_1_P -OP_IF_1_N
differential pair OP_I_2: +OP_I_2_P -OP_I_2_N
differential pair OP_I_1: +OP_I_1_P -OP_I_1_N
differential pair MQ_2: +MQ_2_P -MQ_2_N
differential pair MQ_1: +MQ_1_P -MQ_1_N
differential pair MI_2: +MI_2_P -MI_2_N
differential pair MI_1: +MI_1_P -MI_1_N
differential pair AQ_2: +AQ_2_P -AQ_2_N
differential pair AQ_1: +AQ_1_P -AQ_1_N
differential pair AI_2: +AI_2_P -AI_2_N
differential pair AI_1: +AI_1_P -AI_1_N

## Components (designator, comment, footprint, x,y, rotation, side; value= is the part's Value field where it differs from the comment)
C1_1 "10uF, 16V" SMD-0603 745,790 r90 bottom (schematic designator C1)
C1_2 "10uF, 16V" SMD-0603 3275,3130 r180 bottom (schematic designator C1)
C1_3 "10uF, 16V" SMD-0603 2410,1620 r90 bottom (schematic designator C1)
C1_4 "10uF, 16V" SMD-0603 2410,2310 r90 bottom (schematic designator C1)
C1_5 "10uF, 16V" SMD-0603 2625,370 r180 bottom (schematic designator C1)
C1_6 "10uF, 16V" SMD-0603 2365,1350 r90 bottom (schematic designator C1)
C2_1 "10uF, 16V" SMD-0603 965,790 r90 bottom (schematic designator C2)
C2_2 "10uF, 16V" SMD-0603 3275,3350 r180 bottom (schematic designator C2)
C2_3 "10uF, 16V" SMD-0603 2630,1620 r90 bottom (schematic designator C2)
C2_4 "10uF, 16V" SMD-0603 2630,2310 r90 bottom (schematic designator C2)
C2_5 "10uF, 16V" SMD-0603 2625,590 r180 bottom (schematic designator C2)
C2_6 "10uF, 16V" SMD-0603 2585,1350 r90 bottom (schematic designator C2)
C3_1 "100nF" SMD-0402 815,945 r180 bottom (schematic designator C3)
C3_2 "100nF" SMD-0402 3120,3200 r270 bottom (schematic designator C3)
C3_3 "100nF" SMD-0402 2480,1775 r180 bottom (schematic designator C3)
C3_4 "100nF" SMD-0402 2480,2465 r180 bottom (schematic designator C3)
C3_5 "100nF" SMD-0402 2470,440 r270 bottom (schematic designator C3)
C3_6 "100nF" SMD-0402 2435,1505 r180 bottom (schematic designator C3)
C4_1 "1nF" SMD-0402 590,1205 r0 top (schematic designator C4)
C4_2 "1nF" SMD-0402 3410,2795 r180 top (schematic designator C4)
C5_1 "100pF, CC0402JRNPO9BN101, 16V min" SMD-0402 590,1165 r0 top (schematic designator C5)
C5_2 "100pF, CC0402JRNPO9BN101, 16V min" SMD-0402 3410,2835 r180 top (schematic designator C5)
C6 "2.2nF X7R 16V" SMD-0402 3275,1625 r180 bottom
C6_1 "6.8pF" SMD-0402 590,1125 r0 top (schematic designator C6)
C6_2 "6.8pF" SMD-0402 3410,2875 r180 top (schematic designator C6)
C7_1 "47pF, CC0402JRNPO9BN470" SMD-0402 500,1150 r90 top (schematic designator C7)
C7_2 "47pF, CC0402JRNPO9BN470" SMD-0402 3500,2850 r270 top (schematic designator C7)
C8_1 "47pF, CC0402JRNPO9BN470" SMD-0402 460,1150 r90 top (schematic designator C8)
C8_2 "47pF, CC0402JRNPO9BN470" SMD-0402 3540,2850 r270 top (schematic designator C8)
C9_1 "1uF" SMD-0402 500,655 r270 top (schematic designator C9)
C9_2 "1uF" SMD-0402 3500,3345 r90 top (schematic designator C9)
C10_1 "6.8pF" SMD-0402 500,860 r90 top (schematic designator C10)
C10_2 "6.8pF" SMD-0402 3500,3140 r270 top (schematic designator C10)
C11_1 "0.3pF_50V_C0G" SMD-0402 460,860 r90 top (schematic designator C11)
C11_2 "0.3pF_50V_C0G" SMD-0402 3540,3140 r270 top (schematic designator C11)
C12_1 "1nF" SMD-0402 620,860 r270 top (schematic designator C12)
C12_2 "1nF" SMD-0402 3380,3140 r90 top (schematic designator C12)
C13_1 "100pF, CC0402JRNPO9BN101, 16V min" SMD-0402 580,860 r270 top (schematic designator C13)
C13_2 "100pF, CC0402JRNPO9BN101, 16V min" SMD-0402 3420,3140 r90 top (schematic designator C13)
C14_1 "6.8pF" SMD-0402 540,860 r270 top (schematic designator C14)
C14_2 "6.8pF" SMD-0402 3460,3140 r90 top (schematic designator C14)
C15_1 "3pF" Johanson-0201 585,3185 r0 top (schematic designator C15)
C15_2 "3pF" Johanson-0201 3415,815 r180 top (schematic designator C15)
C16 "2.2nF X7R 16V" SMD-0402 785,1665 r180 bottom
C16_1 "3pF" Johanson-0201 715,3185 r180 top (schematic designator C16)
C16_2 "3pF" Johanson-0201 3285,815 r0 top (schematic designator C16)
C17_1 "3pF" Johanson-0201 585,3140 r0 top (schematic designator C17)
C17_2 "3pF" Johanson-0201 3415,860 r180 top (schematic designator C17)
C18_1 "3pF" Johanson-0201 715,3140 r0 top (schematic designator C18)
C18_2 "3pF" Johanson-0201 3285,860 r180 top (schematic designator C18)
C19_1 "0.3pF_50V_C0G" SMD-0402 480,2835 r270 bottom (schematic designator C19)
C19_2 "0.3pF_50V_C0G" SMD-0402 3515,1175 r90 bottom (schematic designator C19)
C20_1 "1nF" SMD-0402 480,2835 r90 top (schematic designator C20)
C20_2 "1nF" SMD-0402 3515,1175 r270 top (schematic designator C20)
C21_1 "1nF" SMD-0402 440,3165 r90 top (schematic designator C21)
C21_2 "1nF" SMD-0402 3560,835 r270 top (schematic designator C21)
C22_1 "1nF" SMD-0402 400,2760 r90 top (schematic designator C22)
C22_2 "1nF" SMD-0402 3600,1250 r270 top (schematic designator C22)
C23_1 "0.3pF_50V_C0G" SMD-0402 440,2835 r270 bottom (schematic designator C23)
C23_2 "0.3pF_50V_C0G" SMD-0402 3555,1175 r90 bottom (schematic designator C23)
C24_1 "3pF" Johanson-0201 395,3140 r180 top (schematic designator C24)
C24_2 "3pF" Johanson-0201 3605,860 r0 top (schematic designator C24)
C25_1 "3pF" Johanson-0201 265,3140 r180 top (schematic designator C25)
C25_2 "3pF" Johanson-0201 3735,860 r0 top (schematic designator C25)
C26_1 "3pF" Johanson-0201 265,3180 r0 top (schematic designator C26)
C26_2 "3pF" Johanson-0201 3735,820 r180 top (schematic designator C26)
C27_1 "3pF" Johanson-0201 395,3180 r180 top (schematic designator C27)
C27_2 "3pF" Johanson-0201 3605,820 r0 top (schematic designator C27)
C28_1 "1nF" SMD-0402 400,2835 r270 top (schematic designator C28)
C28_2 "1nF" SMD-0402 3595,1175 r90 top (schematic designator C28)
C29_1 "10uF, 16V" SMD-0603 280,2950 r180 bottom (schematic designator C29)
C29_2 "10uF, 16V" SMD-0603 3390,720 r270 bottom (schematic designator C29)
C30 "22uF, CL10A226MO7JZNC" SMD-0603 3145,1890 r0 bottom
C30_1 "10uF, 16V" SMD-0603 280,3180 r180 bottom (schematic designator C30)
C30_2 "10uF, 16V" SMD-0603 3160,720 r270 bottom (schematic designator C30)
C31_1 "100nF" SMD-0402 125,3010 r270 bottom (schematic designator C31)
C31_2 "100nF" SMD-0402 3330,565 r0 bottom (schematic designator C31)
C32_1 "1uF" SMD-0402 2195,1970 r180 bottom (schematic designator C32)
C32_2 "1uF" SMD-0402 2195,2660 r180 bottom (schematic designator C32)
C33_1 "100nF" SMD-0402 2195,1970 r180 top (schematic designator C33)
C33_2 "100nF" SMD-0402 2195,2660 r180 top (schematic designator C33)
C34_1 "1uF" SMD-0402 1950,2050 r270 top (schematic designator C34)
C34_2 "1uF" SMD-0402 1950,2740 r270 top (schematic designator C34)
C35_1 "100nF" SMD-0402 1950,2050 r270 bottom (schematic designator C35)
C35_2 "100nF" SMD-0402 1950,2740 r270 bottom (schematic designator C35)
C36_1 "1uF" SMD-0402 1990,1660 r90 top (schematic designator C36)
C36_2 "1uF" SMD-0402 1990,2350 r90 top (schematic designator C36)
C37_1 "100nF" SMD-0402 1990,1660 r90 bottom (schematic designator C37)
C37_2 "100nF" SMD-0402 1990,2350 r90 bottom (schematic designator C37)
C38_1 "1uF" SMD-0402 2150,1660 r90 top (schematic designator C38)
C38_2 "1uF" SMD-0402 2150,2350 r90 top (schematic designator C38)
C39_1 "100nF" Johanson-0201 2085,2035 r90 top (schematic designator C39)
C39_2 "100nF" Johanson-0201 2085,2725 r90 top (schematic designator C39)
C40_1 "100nF" Johanson-0201 2110,2035 r90 top (schematic designator C40)
C40_2 "100nF" Johanson-0201 2110,2725 r90 top (schematic designator C40)
C41_1 "1uF" SMD-0402 2205,1825 r180 bottom (schematic designator C41)
C41_2 "1uF" SMD-0402 2205,2515 r180 bottom (schematic designator C41)
C42_1 "100nF" SMD-0402 2205,1825.47 r180 top (schematic designator C42)
C42_2 "100nF" SMD-0402 2205,2515.47 r180 top (schematic designator C42)
C43_1 "100nF" Johanson-0201 2010,2035 r90 top (schematic designator C43)
C43_2 "100nF" Johanson-0201 2010,2725 r90 top (schematic designator C43)
C44_1 "100nF" Johanson-0201 1985,2035 r90 top (schematic designator C44)
C44_2 "100nF" Johanson-0201 1985,2725 r90 top (schematic designator C44)
C45 "22uF, CL10A226MO7JZNC" SMD-0603 3145,1835 r0 bottom
C45_1 "1uF" SMD-0402 1775,1740 r0 top (schematic designator C45)
C45_2 "1uF" SMD-0402 1775,2430 r0 top (schematic designator C45)
C46 "22uF, CL10A226MO7JZNC" SMD-0603 670,1865 r0 bottom
C46_1 "100nF" SMD-0402 1775,1740 r0 bottom (schematic designator C46)
C46_2 "100nF" SMD-0402 1775,2430 r0 bottom (schematic designator C46)
C47 "22uF, CL10A226MO7JZNC" SMD-0603 670,1920 r0 bottom
C47_1 "1uF" SMD-0402 2110,1660 r90 top (schematic designator C47)
C47_2 "1uF" SMD-0402 2110,2350 r90 top (schematic designator C47)
C48_1 "1uF" SMD-0402 1830,1645 r90 top (schematic designator C48)
C48_2 "1uF" SMD-0402 1830,2335 r90 top (schematic designator C48)
C49_1 "1uF" SMD-0402 1860,2045 r270 top (schematic designator C49)
C49_2 "1uF" SMD-0402 1860,2735 r270 top (schematic designator C49)
C50_1 "1uF" SMD-0402 1900,2045 r270 top (schematic designator C50)
C50_2 "1uF" SMD-0402 1900,2735 r270 top (schematic designator C50)
C51_1 "1uF" SMD-0402 1785,1895 r0 top (schematic designator C51)
C51_2 "1uF" SMD-0402 1785,2585 r0 top (schematic designator C51)
C52_1 "10uF, 16V" SMD-0603 1760,1790 r0 top (schematic designator C52)
C52_2 "10uF, 16V" SMD-0603 1760,2480 r0 top (schematic designator C52)
C53_1 "470nF" SMD-0402 1910,1660 r90 top (schematic designator C53)
C53_2 "470nF" SMD-0402 1910,2350 r90 top (schematic designator C53)
C54_1 "470pF, 885012006012" SMD-0603 2200,1740 r90 top (schematic designator C54)
C54_2 "470pF, 885012006012" SMD-0603 2200,2430 r90 top (schematic designator C54)
C55_1 "68nF, 885012206070" SMD-0603 2255,1740 r90 top (schematic designator C55)
C55_2 "68nF, 885012206070" SMD-0603 2255,2430 r90 top (schematic designator C55)
C56_1 "2.2nF X7R 16V" SMD-0402 1770,1845.16 r0 top (schematic designator C56)
C56_2 "2.2nF X7R 16V" SMD-0402 1770,2535.16 r0 top (schematic designator C56)
C57_1 "100nF" SMD-0402 2204.89,1884.92 r0 top (schematic designator C57)
C57_2 "100nF" SMD-0402 2204.89,2574.92 r0 top (schematic designator C57)
C58_1 "100nF" SMD-0402 2030,1660 r270 top (schematic designator C58)
C58_2 "100nF" SMD-0402 2030,2350 r270 top (schematic designator C58)
C59_1 "100nF" SMD-0402 2050,2045 r90 top (schematic designator C59)
C59_2 "100nF" SMD-0402 2050,2735 r90 top (schematic designator C59)
C60_1 "100nF" SMD-0402 2070,1660 r270 top (schematic designator C60)
C60_2 "100nF" SMD-0402 2070,2350 r270 top (schematic designator C60)
C61 "100nF" SMD-0402 1825,1433.7 r270 bottom
C62 "1uF" SMD-0402 1785,1433.7 r270 bottom
C63 "100nF" SMD-0402 2190,1356.93 r270 bottom
C64 "1uF" SMD-0402 2230,1356.93 r270 bottom
C65 "100nF" SMD-0402 2465,280 r270 top
C66 "13pF GRM0335C1E130JA01D" Johanson-0201 2465,1135 r90 top
C67 "100nF" SMD-0402 2190,1458.98 r270 bottom
C68 "1uF" SMD-0402 2230,1458.98 r270 bottom
C69 "2.2nF X7R 16V" SMD-0402 1465,2650 r0 bottom
C70 "47uF, C3216X5R1C476M160AB" SMD-1206 1465,2440 r90 bottom
C71 "22uF, CL10A226MO7JZNC" SMD-0603 1475,2550 r180 bottom
C72 "22uF, CL10A226MO7JZNC" SMD-0603 1475,2605 r180 bottom
C73 "47uF, GRM21BR61A476ME15L" SMD-0805 1585,2505 r180 bottom
C74 "47uF, GRM21BR61A476ME15L" SMD-0805 1585,2570 r180 bottom
C75 "47uF, GRM21BR61A476ME15L" SMD-0805 1585,2635 r180 bottom
C76 "22uF, CL10A226MO7JZNC" SMD-0603 1580,2390 r180 bottom
C77 "22uF, CL10A226MO7JZNC" SMD-0603 1580,2445 r180 bottom
C78 "22uF, CL10A226MO7JZNC" SMD-0603 1625,2335 r180 bottom
C79 "22uF, CL10A226MO7JZNC" SMD-0603 1625,2280 r180 bottom
C80 "22uF, CL10A226MO7JZNC" SMD-0603 1625,2225 r180 bottom
C81 "1uF" SMD-0402 1315,2685 r0 bottom
C82 "2.2nF X7R 16V" SMD-0402 1460,1905 r0 bottom
C83 "22uF, CL10A226MO7JZNC" SMD-0603 1465,1800 r180 bottom
C84 "22uF, CL10A226MO7JZNC" SMD-0603 1465,1855 r180 bottom
C85 "47uF, GRM21BR61A476ME15L" SMD-0805 1575,1825 r180 bottom
C86 "47uF, GRM21BR61A476ME15L" SMD-0805 1575,1890 r180 bottom
C87 "47uF, GRM21BR61A476ME15L" SMD-0805 1575,1760 r180 bottom
C88 "22uF, CL10A226MO7JZNC" SMD-0603 1570.47,1700 r180 bottom
C89 "22uF, CL10A226MO7JZNC" SMD-0603 1570,1645 r180 bottom
C90 "22uF, CL10A226MO7JZNC" SMD-0603 1615,1590 r180 bottom
C91 "22uF, CL10A226MO7JZNC" SMD-0603 1615,1535 r180 bottom
C92 "22uF, CL10A226MO7JZNC" SMD-0603 1615,1480 r180 bottom
C93 "1uF" SMD-0402 1320,1940 r0 bottom
C94 "10uF, 16V" SMD-0603 2190,3105 r270 top
C95 "1uF, 25V" SMD-0603 2150,3225 r180 top
C96 "1uF, 25V" SMD-0603 2045,3225 r0 top
C97 "330 uF, 16V, EEU-FM1E331L" CAP-AXIAL-8.0-3.5 1345,3110 r0 top
C98 "47uF, C3216X5R1C476M160AB" SMD-1206 1455,3365 r270 top
C99 "47uF, C3216X5R1C476M160AB" SMD-1206 1370,3365 r270 top
C100 "10uF, 16V, CL21A106KOQNNNE" SMD-0805 1295,3340 r270 top
C101 "1uF, 25V" SMD-0603 1235,3335 r270 top
C102 "100nF, 16V, CC0603KRX7R7BB104" SMD-0603 1180,3335 r270 top
C103 "100nF, 16V, CC0603KRX7R7BB104" SMD-0603 1125,3335 r270 top
C104 "22uF, CL10A226MO7JZNC" SMD-0603 2045,3445 r0 top
C105 "100nF" SMD-0402 1470,1205 r180 top
C106 "100nF" SMD-0402 1350,1205 r0 top
C107 "47uF, C3216X5R1C476M160AB" SMD-1206 3125,3570 r270 top
C108 "47uF, C3216X5R1C476M160AB" SMD-1206 3645,3575 r270 top
C110 "47uF, C3216X5R1C476M160AB" SMD-1206 885,3466.85 r90 top
C111 "47uF, C3216X5R1C476M160AB" SMD-1206 355,3466.85 r90 top
C194 "22uF, CL10A226MO7JZNC" SMD-0603 3260,1675 r0 bottom
C203 "22uF, CL10A226MO7JZNC" SMD-0603 3245,1755 r270 bottom
C227 "47uF, GRM21BR61A476ME15L" SMD-0805 3150,1640 r0 bottom
C228 "47uF, GRM21BR61A476ME15L" SMD-0805 3150,1710 r0 bottom
C229 "47uF, GRM21BR61A476ME15L" SMD-0805 3150,1775 r0 bottom
C231 "22uF, CL10A226MO7JZNC" SMD-0603 3105,1945 r0 bottom
C232 "22uF, CL10A226MO7JZNC" SMD-0603 3105,2055 r0 bottom
C233 "22uF, CL10A226MO7JZNC" SMD-0603 3105,2000 r0 bottom
C234 "1uF" SMD-0402 3425,1590 r180 bottom
C235 "22uF, CL10A226MO7JZNC" SMD-0603 775,1715 r0 bottom
C236 "22uF, CL10A226MO7JZNC" SMD-0603 775,1770 r0 bottom
C237 "47uF, GRM21BR61A476ME15L" SMD-0805 665,1675 r0 bottom
C238 "47uF, GRM21BR61A476ME15L" SMD-0805 665,1740 r0 bottom
C239 "47uF, GRM21BR61A476ME15L" SMD-0805 665,1805 r0 bottom
C241 "22uF, CL10A226MO7JZNC" SMD-0603 625,2035 r0 bottom
C242 "22uF, CL10A226MO7JZNC" SMD-0603 625,1980 r0 bottom
C243 "22uF, CL10A226MO7JZNC" SMD-0603 625,2090 r0 bottom
C244 "1uF" SMD-0402 930,1630 r180 bottom
D1_1 "LED0402, 1.8V" LED-0402 890.32,945 r0 bottom (schematic designator D1)
D1_2 "LED0402, 1.8V" LED-0402 3120,3275.31 r90 bottom (schematic designator D1)
D1_3 "LED0402, 1.8V" LED-0402 2555.32,1775 r0 bottom (schematic designator D1)
D1_4 "LED0402, 1.8V" LED-0402 2555.32,2465 r0 bottom (schematic designator D1)
D1_5 "LED0402, 1.8V" LED-0402 2470,515.32 r90 bottom (schematic designator D1)
D1_6 "LED0402, 1.8V" LED-0402 2510.32,1505 r0 bottom (schematic designator D1)
D2_1 "LED0402, 1.8V" LED-0402 125,3085 r90 bottom (schematic designator D2)
D2_2 "LED0402, 1.8V" LED-0402 3255,565 r180 bottom (schematic designator D2)
D3 "LED0402, 1.8V" LED-0402 1460,2230 r90 bottom
D4 "LED0402, 1.8V" LED-0402 1445,1500 r90 bottom
D5 "LED0402, 1.8V" LED-0402 1075,3320 r90 top
D6 "LED TH RA TLPR5600" "LED TH RA TLPP5600" 2300,100 r0 top locked
D7 "LED TH RA TLPR5600" "LED TH RA TLPP5600" 2000,100 r0 top locked
D8 "LED TH RA TLPR5600" "LED TH RA TLPP5600" 1700,100 r0 top locked
D13 "LED0402, 1.8V" LED-0402 3230,1845 r270 bottom
D18 "LED0402, 1.8V" LED-0402 755,1905 r270 bottom
FB1_1 "100 OHM @ 100 MHz 2506031017Y0" SMD-0603 665,845 r270 top (schematic designator FB1)
FB1_2 "100 OHM @ 100 MHz 2506031017Y0" SMD-0603 3330,3155 r90 top (schematic designator FB1)
FB2 "BLM15AX102SN1D" SMD-0402 1745,1433.7 r90 bottom
FB3 "BLM15AX102SN1D" SMD-0402 2270,1356.93 r90 bottom
FB4 "BLM15AX102SN1D" SMD-0402 2270,1458.98 r90 bottom
J1 "KPJX-4S" KYCON_KPJX-4S 2450,3410 r180 top
J2 "Amphenol 67997-402HLF 2-pin Header" "Amphenol  67997-402HLF 2-pin header" 1225,3720 r180 top
J3 "901-10510-1" "AMPHENOL RF 901-10510-1 - 8.8MIL GCPW" 3500,0 r270 top locked
J4 "901-10510-1" "AMPHENOL RF 901-10510-1 - 8.8MIL GCPW" 3500,4000 r90 top locked
J5 "901-10510-1" "AMPHENOL RF 901-10510-1 - 8.8MIL GCPW" 500,4000 r90 top locked
J6 "901-10510-1" "AMPHENOL RF 901-10510-1 - 8.8MIL GCPW" 500,0 r270 top
J7 "901-10510-1" "AMPHENOL RF 901-10510-1 - 8.8MIL GCPW" 2700,0 r270 top locked
J8 "901-10510-1" "AMPHENOL RF 901-10510-1 - 8.8MIL GCPW" 1300,0 r270 top locked
J9 "Molex 1718560002 2-pin Header with Lock" "Molex 1718560002 2-pin header with lock" 3820,3520 r90 top
J10 "Molex 1718560002 2-pin Header with Lock" "Molex 1718560002 2-pin header with lock" 3300,3520 r90 top
J11 "Molex 1718560002 2-pin Header with Lock" "Molex 1718560002 2-pin header with lock" 180,3520 r90 top
J12 "Molex 1718560002 2-pin Header with Lock" "Molex 1718560002 2-pin header with lock" 700,3520 r90 top
J13 "Amphenol 67997-402HLF 2-pin Header" "Amphenol  67997-402HLF 2-pin header" 3200,2295 r0 top
J24 "Amphenol 67997-402HLF 2-pin Header" "Amphenol  67997-402HLF 2-pin header" 3392,1920 r0 top
J25 "Amphenol 67997-402HLF 2-pin Header" "Amphenol  67997-402HLF 2-pin header" 858,1920 r180 top
JX1 "61083-104400LF" "Bergstak FCI_61083-101400LF" 1125,2000 r270 bottom locked
JX2 "61083-104400LF" "Bergstak FCI_61083-101400LF" 2875,2000 r270 bottom locked
L1_1 "22nH, LQG15HS22NJ02D" SMD-0402 630,3160 r90 top (schematic designator L1)
L1_2 "22nH, LQG15HS22NJ02D" SMD-0402 3370,840 r270 top (schematic designator L1)
L2_1 "22nH, LQG15HS22NJ02D" SMD-0402 670,3160 r90 top (schematic designator L2)
L2_2 "22nH, LQG15HS22NJ02D" SMD-0402 3330,840 r270 top (schematic designator L2)
L3_1 "22nH, LQG15HS22NJ02D" SMD-0402 350,3160 r270 top (schematic designator L3)
L3_2 "22nH, LQG15HS22NJ02D" SMD-0402 3650,840 r90 top (schematic designator L3)
L4_1 "22nH, LQG15HS22NJ02D" SMD-0402 310,3160 r270 top (schematic designator L4)
L4_2 "22nH, LQG15HS22NJ02D" SMD-0402 3690,840 r90 top (schematic designator L4)
L5 "FB, BLM31KN102SN1L" SMD-1206 1530,2275 r270 bottom
L6 "FB, BLM31KN102SN1L" SMD-1206 1520,1535 r270 bottom
L17 "FB, BLM31KN102SN1L" SMD-1206 3200,2000 r90 bottom
L18 "FB, BLM31KN102SN1L" SMD-1206 720,2035 r90 bottom
Q1 "BSS138BKW,115" BSS138BKW,115 2045,3330 r270 top
R1_1 "44.2k, 1%" SMD-0402 735,860 r180 bottom (schematic designator R1)
R1_2 "44.2k, 1%" SMD-0402 3205,3120 r270 bottom (schematic designator R1)
R1_3 "44.2k, 1%" SMD-0402 2400,1690 r180 bottom (schematic designator R1)
R1_4 "44.2k, 1%" SMD-0402 2400,2380 r180 bottom (schematic designator R1)
R1_5 "44.2k, 1%" SMD-0402 2555,360 r270 bottom (schematic designator R1)
R1_6 "44.2k, 1%" SMD-0402 2355,1420 r180 bottom (schematic designator R1)
R2_1 "1k" SMD-0402 975,860 r0 bottom (schematic designator R2)
R2_2 "1k" SMD-0402 3205,3360 r90 bottom (schematic designator R2)
R2_3 "1k" SMD-0402 2640,1690 r0 bottom (schematic designator R2)
R2_4 "1k" SMD-0402 2640,2380 r0 bottom (schematic designator R2)
R2_5 "1k" SMD-0402 2555,600 r90 bottom (schematic designator R2)
R2_6 "1k" SMD-0402 2595,1420 r0 bottom (schematic designator R2)
R3_1 "2k" SMD-0402 965,945 r180 bottom (schematic designator R3)
R3_2 "2k" SMD-0402 3120,3350 r270 bottom (schematic designator R3)
R3_3 "2k" SMD-0402 2630,1775 r180 bottom (schematic designator R3)
R3_4 "2k" SMD-0402 2630,2465 r180 bottom (schematic designator R3)
R3_5 "2k" SMD-0402 2470,590 r270 bottom (schematic designator R3)
R3_6 "2k" SMD-0402 2585,1505 r180 bottom (schematic designator R3)
R4_1 "25.5k RC0402FR-0725K5L" SMD-0402 735,900 r0 bottom (schematic designator R4)
R4_2 "25.5k RC0402FR-0725K5L" SMD-0402 3165,3120 r90 bottom (schematic designator R4)
R4_3 "25.5k RC0402FR-0725K5L" SMD-0402 2400,1730 r0 bottom (schematic designator R4)
R4_4 "25.5k RC0402FR-0725K5L" SMD-0402 2400,2420 r0 bottom (schematic designator R4)
R4_5 "25.5k RC0402FR-0725K5L" SMD-0402 2515,360 r90 bottom (schematic designator R4)
R4_6 "25.5k RC0402FR-0725K5L" SMD-0402 2355,1460 r0 bottom (schematic designator R4)
R5_1 "100k" SMD-0402 975,900 r180 bottom (schematic designator R5)
R5_2 "100k" SMD-0402 3165,3360 r270 bottom (schematic designator R5)
R5_3 "100k" SMD-0402 2640,1730 r180 bottom (schematic designator R5)
R5_4 "100k" SMD-0402 2640,2420 r180 bottom (schematic designator R5)
R5_5 "100k" SMD-0402 2515,600 r270 bottom (schematic designator R5)
R5_6 "100k" SMD-0402 2595,1460 r180 bottom (schematic designator R5)
R6_1 "50, MCS04020C4999FE000" SMD-0402 420,1150 r90 top (schematic designator R6)
R6_2 "50, MCS04020C4999FE000" SMD-0402 3580,2850 r270 top (schematic designator R6)
R7_1 "50, MCS04020C4999FE000" SMD-0402 615,960 r90 top (schematic designator R7)
R7_2 "50, MCS04020C4999FE000" SMD-0402 3385,3040 r270 top (schematic designator R7)
R8_1 "50, MCS04020C4999FE000" SMD-0402 615,1035 r270 top (schematic designator R8)
R8_2 "50, MCS04020C4999FE000" SMD-0402 3385,2965 r90 top (schematic designator R8)
R9_1 "50, MCS04020C4999FE000" SMD-0402 365,965 r90 top (schematic designator R9)
R9_2 "50, MCS04020C4999FE000" SMD-0402 3635,3035 r270 top (schematic designator R9)
R10_1 "50, MCS04020C4999FE000" SMD-0402 365,1040 r270 top (schematic designator R10)
R10_2 "50, MCS04020C4999FE000" SMD-0402 3635,2960 r90 top (schematic designator R10)
R11_1 "50, MCS04020C4999FE000" SMD-0402 735,2815.32 r90 bottom (schematic designator R11)
R11_2 "50, MCS04020C4999FE000" SMD-0402 3265,1184.68 r270 bottom (schematic designator R11)
R12_1 "50, MCS04020C4999FE000" SMD-0402 645,2815.32 r270 bottom (schematic designator R12)
R12_2 "50, MCS04020C4999FE000" SMD-0402 3355,1184.68 r90 bottom (schematic designator R12)
R13_1 "50, MCS04020C4999FE000" SMD-0402 440,2835 r270 top (schematic designator R13)
R13_2 "50, MCS04020C4999FE000" SMD-0402 3555,1175 r90 top (schematic designator R13)
R14_1 "50, MCS04020C4999FE000" SMD-0402 335,2815.32 r90 bottom (schematic designator R14)
R14_2 "50, MCS04020C4999FE000" SMD-0402 3665,1184.68 r270 bottom (schematic designator R14)
R15_1 "50, MCS04020C4999FE000" SMD-0402 245,2815.32 r270 bottom (schematic designator R15)
R15_2 "50, MCS04020C4999FE000" SMD-0402 3755,1184.68 r90 bottom (schematic designator R15)
R16_1 "44.2k, 1%" SMD-0402 210,2940 r270 bottom (schematic designator R16)
R16_2 "44.2k, 1%" SMD-0402 3400,650 r0 bottom (schematic designator R16)
R17_1 "1k" SMD-0402 205,3190 r90 bottom (schematic designator R17)
R17_2 "1k" SMD-0402 3150,645 r180 bottom (schematic designator R17)
R18_1 "2k" SMD-0402 125,3160 r270 bottom (schematic designator R18)
R18_2 "2k" SMD-0402 3180,565 r0 bottom (schematic designator R18)
R19_1 "14k" SMD-0402 170,2940 r90 bottom (schematic designator R19)
R19_2 "14k" SMD-0402 3400,610 r180 bottom (schematic designator R19)
R20_1 "100k" SMD-0402 165,3190 r270 bottom (schematic designator R20)
R20_2 "100k" SMD-0402 3150,605 r0 bottom (schematic designator R20)
R21_1 "100" SMD-0402 1950,1660 r90 top (schematic designator R21)
R21_2 "100" SMD-0402 1950,2350 r90 top (schematic designator R21)
R22_1 "100" SMD-0402 1785,1965 r180 top (schematic designator R22)
R22_2 "100" SMD-0402 1785,2655 r180 top (schematic designator R22)
R23_1 "100" SMD-0402 2195,1930 r0 top (schematic designator R23)
R23_2 "100" SMD-0402 2195,2620 r0 top (schematic designator R23)
R24_1 "18.2, CRCW060318R2FKEA" SMD-0603 2310,1740 r270 top (schematic designator R24)
R24_2 "18.2, CRCW060318R2FKEA" SMD-0603 2310,2430 r270 top (schematic designator R24)
R25_1 "100k" SMD-0402 1870,1645 r270 top (schematic designator R25)
R25_2 "100k" SMD-0402 1870,2335 r270 top (schematic designator R25)
R26_1 "50, MCS04020C4999FE000" SMD-0402 2280,1885 r0 top (schematic designator R26)
R26_2 "50, MCS04020C4999FE000" SMD-0402 2280,2575 r0 top (schematic designator R26)
R27_1 "68.1, CRCW060368R1FK" SMD-0603 2225,1660 r0 top (schematic designator R27)
R27_2 "68.1, CRCW060368R1FK" SMD-0603 2225,2350 r0 top (schematic designator R27)
R28_1 "50, MCS04020C4999FE000" SMD-0402 2015,1600 r0 top (schematic designator R28)
R28_2 "50, MCS04020C4999FE000" SMD-0402 2015,2290 r0 top (schematic designator R28)
R29_1 "50, MCS04020C4999FE000" SMD-0402 2090,1600 r0 top (schematic designator R29)
R29_2 "50, MCS04020C4999FE000" SMD-0402 2090,2290 r0 top (schematic designator R29)
R30 "43, RC0201FR-0743RL" Johanson-0201 2195,1504.57 r0 top locked
R31 "43, RC0201FR-0743RL" Johanson-0201 2195,1453.39 r0 top locked
R32 "43, RC0201FR-0743RL" Johanson-0201 2195,1402.2 r0 top locked
R33 "43, RC0201FR-0743RL" Johanson-0201 2195,1351.02 r0 top locked
R34 "9.1k" SMD-0402 1315,2845 r180 bottom
R35 "1k" SMD-0402 1315,2885 r0 bottom
R36 "25.5k RC0402FR-0725K5L" SMD-0402 1315,2765 r180 bottom
R37 "42.2k, 1%" SMD-0402 1315,2805 r0 bottom
R38 "4.87k" SMD-0402 1315,2725 r0 bottom
R39 "2k" SMD-0402 1460,2305 r270 bottom
R40 "0, ERJ-2GE0R00X" SMD-0402 1315,2645 r180 bottom
R41 "0, ERJ-2GE0R00X" SMD-0402 1320,2100 r0 bottom
R42 "6.04k" SMD-0402 1320,2020 r180 bottom
R43 "42.2k, 1%" SMD-0402 1320,2060 r0 bottom
R44 "4.87k" SMD-0402 1320,1980 r0 bottom
R45 "100" SMD-0402 1445,1575 r270 bottom
R46 "0, ERJ-2GE0R00X" SMD-0402 1320,1900 r180 bottom
R47 "10k" SMD-0402 2240,3105 r270 top
R48 "10k" SMD-0402 2045,3175 r0 top
R49 "2k" SMD-0402 2120,3405 r270 top
R50 "2k" SMD-0402 1075,3395 r270 top
R51 "37k, RN73H1ETTP3702F25" SMD-0402 2135,3275 r0 top
R52 "100" SMD-0402 2054.68,3495 r0 top
R53 "9.1k" SMD-0402 3425,1390 r0 bottom
R54 "42.2k, 1%" SMD-0402 3425,1470 r180 bottom
R55 "1k" SMD-0402 3425,1430 r180 bottom
R56 "28.7k" SMD-0402 3425,1550 r0 bottom
R57 "10k" SMD-0402 1294.68,1144.25 r0 top
R58 "10k" SMD-0402 1284.68,967.09 r0 top
R59 "10k" SMD-0402 1530,1220.32 r90 top
R60 "1k" SMD-0402 2370,135 r180 top
R61 "100" SMD-0402 2070,135 r180 top
R62 "100" SMD-0402 1770,135 r180 top
R66 "4.87k" SMD-0402 3425,1510 r180 bottom
R90 "2k" SMD-0402 3270,1845 r270 bottom
R91 "0, ERJ-2GE0R00X" SMD-0402 3425,1630 r0 bottom
R92 "9.1k" SMD-0402 930,1430 r0 bottom
R93 "1k" SMD-0402 930,1470 r180 bottom
R94 "17.8k" SMD-0402 930,1550 r0 bottom
R95 "42.2k, 1%" SMD-0402 930,1510 r180 bottom
R96 "4.87k" SMD-0402 930,1590 r180 bottom
R97 "2k" SMD-0402 755,1830 r90 bottom
R98 "0, ERJ-2GE0R00X" SMD-0402 930,1670 r0 bottom
SW1 "1101M2S3AQE2" 1101M2S3ABE2 1652.5,3748.15 r180 top locked
TP1 "Keystone 5004" "KEYSTONE 5004 TESTPOINT" 2950,805 r0 top
TP2 "Keystone 5004" "KEYSTONE 5004 TESTPOINT" 865,2290 r0 top
TP3 "Keystone 5004" "KEYSTONE 5004 TESTPOINT" 1345,1630 r0 top
TP4 "Keystone 5004" "KEYSTONE 5004 TESTPOINT" 2950,600 r0 top
TP5 "Keystone 5004" "Keystone 5004 Testpoint" 1345,2370 r0 top
TP6 "Keystone 5004" "Keystone 5004 Testpoint" 150,2290 r0 top
U1_1 "ADM7172ACPZ" ADM7172_VIA_NOSILK 855,835 r0 bottom value=Value (schematic designator U1)
U1_2 "ADM7172ACPZ" ADM7172_VIA_NOSILK 3230,3240 r90 bottom value=Value (schematic designator U1)
U1_3 "ADM7172ACPZ" ADM7172_VIA_NOSILK 2520,1665 r0 bottom value=Value (schematic designator U1)
U1_4 "ADM7172ACPZ" ADM7172_VIA_NOSILK 2520,2355 r0 bottom value=Value (schematic designator U1)
U1_5 "ADM7172ACPZ" ADM7172_VIA_NOSILK 2580,480 r90 bottom value=Value (schematic designator U1)
U1_6 "ADM7172ACPZ" ADM7172_VIA_NOSILK 2475,1395 r0 bottom value=Value (schematic designator U1)
U2_1 "MiniCircuits_LFCG-4800+" "MiniCircuits LFCG-1400+" 500,1260 r270 top (schematic designator U2)
U2_2 "MiniCircuits_LFCG-4800+" "MiniCircuits LFCG-1400+" 3500,2740 r90 top (schematic designator U2)
U3_1 "Texas Instruments TRF3705" TI_RGE0024B 490,1000 r270 top (schematic designator U3)
U3_2 "Texas Instruments TRF3705" TI_RGE0024B 3510,3000 r90 top (schematic designator U3)
U4_1 "MiniCircuits_LFCG-4800+" "MiniCircuits LFCG-1400+" 500,755 r270 top (schematic designator U4)
U4_2 "MiniCircuits_LFCG-4800+" "MiniCircuits LFCG-1400+" 3500,3245 r90 top (schematic designator U4)
U5_1 "MiniCircuits_LFCG-400+" "MiniCircuits LFCG-1400+" 735,2795 r270 top (schematic designator U5)
U5_2 "MiniCircuits_LFCG-400+" "MiniCircuits LFCG-1400+" 3265,1205 r90 top (schematic designator U5)
U6_1 "MiniCircuits_LFCG-400+" "MiniCircuits LFCG-1400+" 645,2795 r270 top (schematic designator U6)
U6_2 "MiniCircuits_LFCG-400+" "MiniCircuits LFCG-1400+" 3355,1205 r90 top (schematic designator U6)
U7_1 "LTC5594" LTC5594 490,3000 r270 top (schematic designator U7)
U7_2 "LTC5594" LTC5594 3510,1000 r90 top (schematic designator U7)
U8_1 "MiniCircuits_LFCG-4800+" "MiniCircuits LFCG-1400+" 500,3190 r270 top (schematic designator U8)
U8_2 "MiniCircuits_LFCG-4800+" "MiniCircuits LFCG-1400+" 3500,810 r90 top (schematic designator U8)
U9_1 "MiniCircuits_LFCG-4800+" "MiniCircuits LFCG-1400+" 480,2735 r90 top (schematic designator U9)
U9_2 "MiniCircuits_LFCG-4800+" "MiniCircuits LFCG-1400+" 3520,1275 r270 top (schematic designator U9)
U10_1 "MiniCircuits_LFCG-400+" "MiniCircuits LFCG-1400+" 335,2795 r270 top (schematic designator U10)
U10_2 "MiniCircuits_LFCG-400+" "MiniCircuits LFCG-1400+" 3665,1205 r90 top (schematic designator U10)
U11_1 "MiniCircuits_LFCG-400+" "MiniCircuits LFCG-1400+" 245,2795 r270 top (schematic designator U11)
U11_2 "MiniCircuits_LFCG-400+" "MiniCircuits LFCG-1400+" 3755,1205 r90 top (schematic designator U11)
U12_1 "ADM7172ACPZ" ADM7172_VIA_NOSILK 233.31,3066.6 r90 bottom value=Value (schematic designator U12)
U12_2 "ADM7172ACPZ" ADM7172_VIA_NOSILK 3273.4,673.31 r180 bottom value=Value (schematic designator U12)
U13_1 "LMX2820RTCT" "TI LMX2820" 2000,1855 r90 top (schematic designator U13)
U13_2 "LMX2820RTCT" "TI LMX2820" 2000,2545 r90 top (schematic designator U13)
U14 "OH320-CC-700503CF-010.0M" OH320-CC-700503CF-010.0M 2000,700 r0 top
U15 "LMK00804BPW" LMK00804 2010,1415 r0 top
U16 "TPSM82913RDU" TPSM82913DRUR 1500,2790 r270 bottom
U17 "TPSM82913RDU" TPSM82913DRUR 1495,2040 r270 bottom
U18 "Alpha&Omega AONR21117" ALPHA&OMEGA_AONR21321 2084.88,3076.61 r180 top
U19 "BNX016-01" FIL_BNX016-01 1860,3100 r270 top
U20 "SN74AXC8T245RHLR" RHL0024A 1419.53,1055.67 r0 top
U48 "TPSM82913RDU" TPSM82913DRUR 3245,1490 r90 bottom
U49 "TPSM82913RDU" TPSM82913DRUR 750,1525 r90 bottom

## Footprints (in the part's own frame and the unit in brackets; to place one, negate y for a bottom-side part, rotate by r counter-clockwise, add the part's x,y. Pads: shape width x height; smd on the part's side, far side on the other; paste and mask are expansions set on the pad)
1101M2S3ABE2 [mil] "Horizontal Actuation SPDT Right Angle, PC THRU-HOLE"
  round 90 hole 73: 1(185,215) 2(0,215) 3(-185,215) 4(260,-160) 5(-260,-160)
  silkscreen extent -340,-235 335,120, body extent -267,-375 267,246, height 283
ADM7172_VIA_NOSILK [mm]
  oval 0.7x0.25 smd: 1(-1.5,0.75) 2(-1.5,0.25) 3(-1.5,-0.25) 4(-1.5,-0.75) 5(1.5,-0.75) 6(1.5,-0.25) 7(1.5,0.25) 8(1.5,0.75)
  rect 1.6x2.44 smd paste-0.157: 9(0,0)
  L1-Top lines w0.254: 0.25,-0.25 1.5,-0.25
  silkscreen extent -1.47,1.23 -1.22,1.47, body extent -1.55,-1.55 1.55,1.55, height 0.8
ALPHA&OMEGA_AONR21321 [mm]
  rect 0.5x0.35 smd mask+0.025: 1(-1.4,0.975) 2(-1.4,0.325) 3(-1.4,-0.325) 4(-1.4,-0.975)
  rect 0.33x0.4 smd mask+0.025: 5(1.5,-0.975) 6(1.5,-0.325) 7(1.5,0.325) 8(1.5,0.975)
  rect 0.43x0.406 smd mask+0.025: 8(0,1.415) 8(0,-1.415)
  rect 1.98x2.45 smd paste-2 mask+0.025: 8(0.36,0)
  silkscreen extent -2,-1.55 1.55,1.95, body extent -1.6,-1.55 1.6,1.55, height 0.9
"Amphenol  67997-402HLF 2-pin header" [mil] "Conn Unshrouded Header HDR 2 POS Solder ST Top Entry Thru-Hole BergStik® Bulk"
  round 60 hole 40 paste-99999 mask+0: 1(0,-50) 2(0,50)
  silkscreen extent -60,-105 55,100, body extent -50,-95 50,95, height 322
"AMPHENOL RF 901-10510-1 - 8.8MIL GCPW" [mil] "SMA Connector Jack, Female Socket 50 Ohms Board Edge, End Launch; Through Hole, Right Angle Solder /  / 8 mil GCPW"
  round 50 hole 38 mask+2: G(-156,-48) G(-156,48) G(-69,48) G(-69,-48)
  round 12 hole 6 paste-99999 mask+0: G(-125,-25) G(-125,25) G(-100,-25) G(-100,25) G(-40,25) G(-40,-25) G(-15,25) G(-15,-25)
  round 3 smd paste-5 mask+0: S(-190,0)
  L1-Top region: -190,-140 -10,-140 -10,-18 -190,-18
  L1-Top region: -190,-18 -150,-18 -150,-9.4 -190,-9.4
  L1-Top region: -60,-8 -40,-8 -40,8 -60,8
  L1-Top region: -190,9.4 -150,9.4 -150,18 -190,18
  L1-Top region: -190,-4.4 -150,-4.4 -150,4.4 -190,4.4
  L1-Top region: -190,18 -10,18 -10,140 -190,140
  L1-Top region: -46,-8 -7,-8 -7,8 -46,8
  L1-Top region: -150,-18 -150,-9.4 -60,-18
  L1-Top region: -150,18 -150,9.4 -60,18
  L1-Top region: -150,4.4 -60,8 -60,-8 -150,-4.4
  L1-Top keep-out region: -150,-9.4 -150,-4.4 -60,-8 -10,-8 -10,-18 -60,-18
  L1-Top keep-out region: -150,9.4 -150,4.4 -60,8 -10,8 -10,18 -60,18
  body extent -179,-125 375,125, height 130
"Bergstak FCI_61083-101400LF" [mm] "For MicroZed"
  rect 0.5x2 smd mask+0.025: 1(-19.6,2.2) 2(-19.6,-2.2) 3(-18.8,2.2) 4(-18.8,-2.2) 5(-18,2.2) 6(-18,-2.2) 7(-17.2,2.2) 8(-17.2,-2.2) 9(-16.4,2.2) 10(-16.4,-2.2) 11(-15.6,2.2) 12(-15.6,-2.2) 13(-14.8,2.2) 14(-14.8,-2.2) 15(-14,2.2) 16(-14,-2.2) 17(-13.2,2.2) 18(-13.2,-2.2) 19(-12.4,2.2) 20(-12.4,-2.2) 21(-11.6,2.2) 22(-11.6,-2.2) 23(-10.8,2.2) 24(-10.8,-2.2) 25(-10,2.2) 26(-10,-2.2) 27(-9.2,2.2) 28(-9.2,-2.2) 29(-8.4,2.2) 30(-8.4,-2.2) 31(-7.6,2.2) 32(-7.6,-2.2) 33(-6.8,2.2) 34(-6.8,-2.2) 35(-6,2.2) 36(-6,-2.2) 37(-5.2,2.2) 38(-5.2,-2.2) 39(-4.4,2.2) 40(-4.4,-2.2) 41(-3.6,2.2) 42(-3.6,-2.2) 43(-2.8,2.2) 44(-2.8,-2.2) 45(-2,2.2) 46(-2,-2.2) 47(-1.2,2.2) 48(-1.2,-2.2) 49(-0.4,2.2) 50(-0.4,-2.2) 51(0.4,2.2) 52(0.4,-2.2) 53(1.2,2.2) 54(1.2,-2.2) 55(2,2.2) 56(2,-2.2) 57(2.8,2.2) 58(2.8,-2.2) 59(3.6,2.2) 60(3.6,-2.2) 61(4.4,2.2) 62(4.4,-2.2) 63(5.2,2.2) 64(5.2,-2.2) 65(6,2.2) 66(6,-2.2) 67(6.8,2.2) 68(6.8,-2.2) 69(7.6,2.2) 70(7.6,-2.2) 71(8.4,2.2) 72(8.4,-2.2) 73(9.2,2.2) 74(9.2,-2.2) 75(10,2.2) 76(10,-2.2) 77(10.8,2.2) 78(10.8,-2.2) 79(11.6,2.2) 80(11.6,-2.2) 81(12.4,2.2) 82(12.4,-2.2) 83(13.2,2.2) 84(13.2,-2.2) 85(14,2.2) 86(14,-2.2) 87(14.8,2.2) 88(14.8,-2.2) 89(15.6,2.2) 90(15.6,-2.2) 91(16.4,2.2) 92(16.4,-2.2) 93(17.2,2.2) 94(17.2,-2.2) 95(18,2.2) 96(18,-2.2) 97(18.8,2.2) 98(18.8,-2.2) 99(19.6,2.2) 100(19.6,-2.2)
  silkscreen extent -22.9,-3 22.9,3.5, body extent -22.9,-3 22.9,3, height 4.65
BSS138BKW,115 [mm]
  rrect25% 0.99x0.5 smd: D(0.97,0) G(-0.97,0.65) S(-0.97,-0.65)
  silkscreen extent -2.1,-1.21 0.63,1.21, body extent -1.05,-1 1.05,1, height 1.1
CAP-AXIAL-8.0-3.5 [mm] "Polarized Capacitor (Radial); 2 Leads"
  rect 1.2x1.2 hole 0.7: 1(1.75,0)
  round 1.2 hole 0.7: 2(-1.75,0)
  silkscreen extent -4,-4 4,4, body extent -4,-4 4,4, height 15
FIL_BNX016-01 [mm] "6 pin Through Hole EMI Filter"
  rect 1.8x1.8 hole 1.2: 1(0,0)
  round 1.8 hole 1.2: 2(-5,0) 3(-2.5,-2.5) 4(2.5,-2.5) 5(0,-5) 6(-5,-5)
  silkscreen extent -8.5,-8 3.63,3.13, body extent -8.5,-8 3.5,3, height 8.69
Johanson-0201 [mm] "Chip Capacitor, 2-Leads, Body 0.82x0.37mm, IPC Medium Density"
  rect 0.36x0.41 smd paste-0.01 mask+0.05: 1(-0.33,0) 2(0.33,0)
  body extent -0.51,-0.2 0.51,0.21, height 0.6
"KEYSTONE 5004 TESTPOINT" [mm]
  round 1.53 hole 1.02: 1(0,0)
  silkscreen extent -1.27,-1.27 1.27,1.27, body extent -1.26,-1.27 1.26,1.27, height 4.69
"Keystone 5004 Testpoint" [mm]
  round 1.53 hole 1.02: 1(0,0)
  silkscreen extent -1.27,-1.27 1.27,1.27, body extent -1.26,-1.27 1.26,1.27, height 4.69
KYCON_KPJX-4S [mm]
  oval 1.6x3.2 hole 0.6 slot 2.7 at 90 deg: 1(-2.9,0) 2(2.9,0) 3(-2.5,-3.65) 4(2.5,-3.65)
  oval 3.5x1.75 hole 1 slot 2.2 at 0 deg: S1(0,-9.15)
  silkscreen extent -7.5,-14.65 7.5,3.2, body extent -7.5,-14.65 7.5,2.35, height 15.07
"LED TH RA TLPP5600" [mm]
  round 1.55 hole 1.05: 1(1.27,-0.7) 2(-1.27,-0.7)
  silkscreen extent -2.25,-2.16 2.97,0, body extent -2.25,-4 2.25,0, height 7.48
LED-0402 [mm] "0402 Imperial"
  rect 0.65x0.65 smd mask+0.025: 1(-0.45,0) 2(0.45,0)
  silkscreen extent -1.15,0.28 0.88,0.7, body extent -0.5,-0.25 0.5,0.25, height 0.56
LMK00804 [mm]
  rect 1.475x0.45 smd mask+0.025: 1(-2.938,2.275) 2(-2.938,1.625) 3(-2.938,0.975) 4(-2.938,0.325) 5(-2.938,-0.325) 6(-2.938,-0.975) 7(-2.938,-1.625) 8(-2.938,-2.275) 9(2.938,-2.275) 10(2.938,-1.625) 11(2.938,-0.975) 12(2.938,-0.325) 13(2.938,0.325) 14(2.938,0.975) 15(2.938,1.625) 16(2.938,2.275)
  silkscreen extent -3.67,-2.5 1.85,2.85, body extent -3.2,-2.5 3.2,2.5, height 1.2
LTC5594 [mm] "QFN, 32-Leads, Body 5.00x5.00mm, Pitch 0.50mm, Thermal Pad 3.45x3.45mm, IPC Medium Density"
  oval 0.9x0.25 smd paste-0.032 mask+0: 1(-2.375,1.75) 2(-2.375,1.25) 3(-2.375,0.75) 4(-2.375,0.25) 5(-2.375,-0.25) 6(-2.375,-0.75) 7(-2.375,-1.25) 8(-2.375,-1.75) 17(2.375,-1.75) 18(2.375,-1.25) 19(2.375,-0.75) 20(2.375,-0.25) 21(2.375,0.25) 22(2.375,0.75) 23(2.375,1.25) 24(2.375,1.75)
  oval 0.25x0.9 smd paste-0.032 mask+0: 9(-1.75,-2.375) 10(-1.25,-2.375) 11(-0.75,-2.375) 12(-0.25,-2.375) 13(0.25,-2.375) 14(0.75,-2.375) 15(1.25,-2.375) 16(1.75,-2.375) 25(1.75,2.375) 26(1.25,2.375) 27(0.75,2.375) 28(0.25,2.375) 29(-0.25,2.375) 30(-0.75,2.375) 31(-1.25,2.375) 32(-1.75,2.375)
  rect 3.45x3.45 smd paste-1.725 mask+0: 33(0,0)
  silkscreen extent -2.95,-2.65 2.65,2.95, body extent -2.5,-2.5 2.5,2.5, height 0.8
"MiniCircuits LFCG-1400+" [mm] "LTCC Low Pass Filter, DC - 1400 MHz, 50O"
  rect 0.305x0.5 smd mask+0.051: 1(-0.65,-0.65) 2(0,-0.65) 3(0.65,-0.65) 5(0.65,0.65) 6(0,0.65) 7(-0.65,0.65)
  rect 0.635x0.305 smd mask+0.051: 4(1.016,0) 8(-1.016,0)
  silkscreen extent -1.35,-0.9 -1.15,-0.7, body extent -1,-0.62 1,0.62, height 0.94